# Altium PCB USB_Control.PcbDoc (part 1 of 2)
Units mil, origin at the board's own origin, x right, y up, seen from the top; angles counter-clockwise.
Board outline 3609 x 2250 mil, 4 copper layers (Component Side, Ground Plane, Power Plane, Solder Side), stack 26.634 mil thick; 208 components, 136 nets, 707 pads, 296 vias.
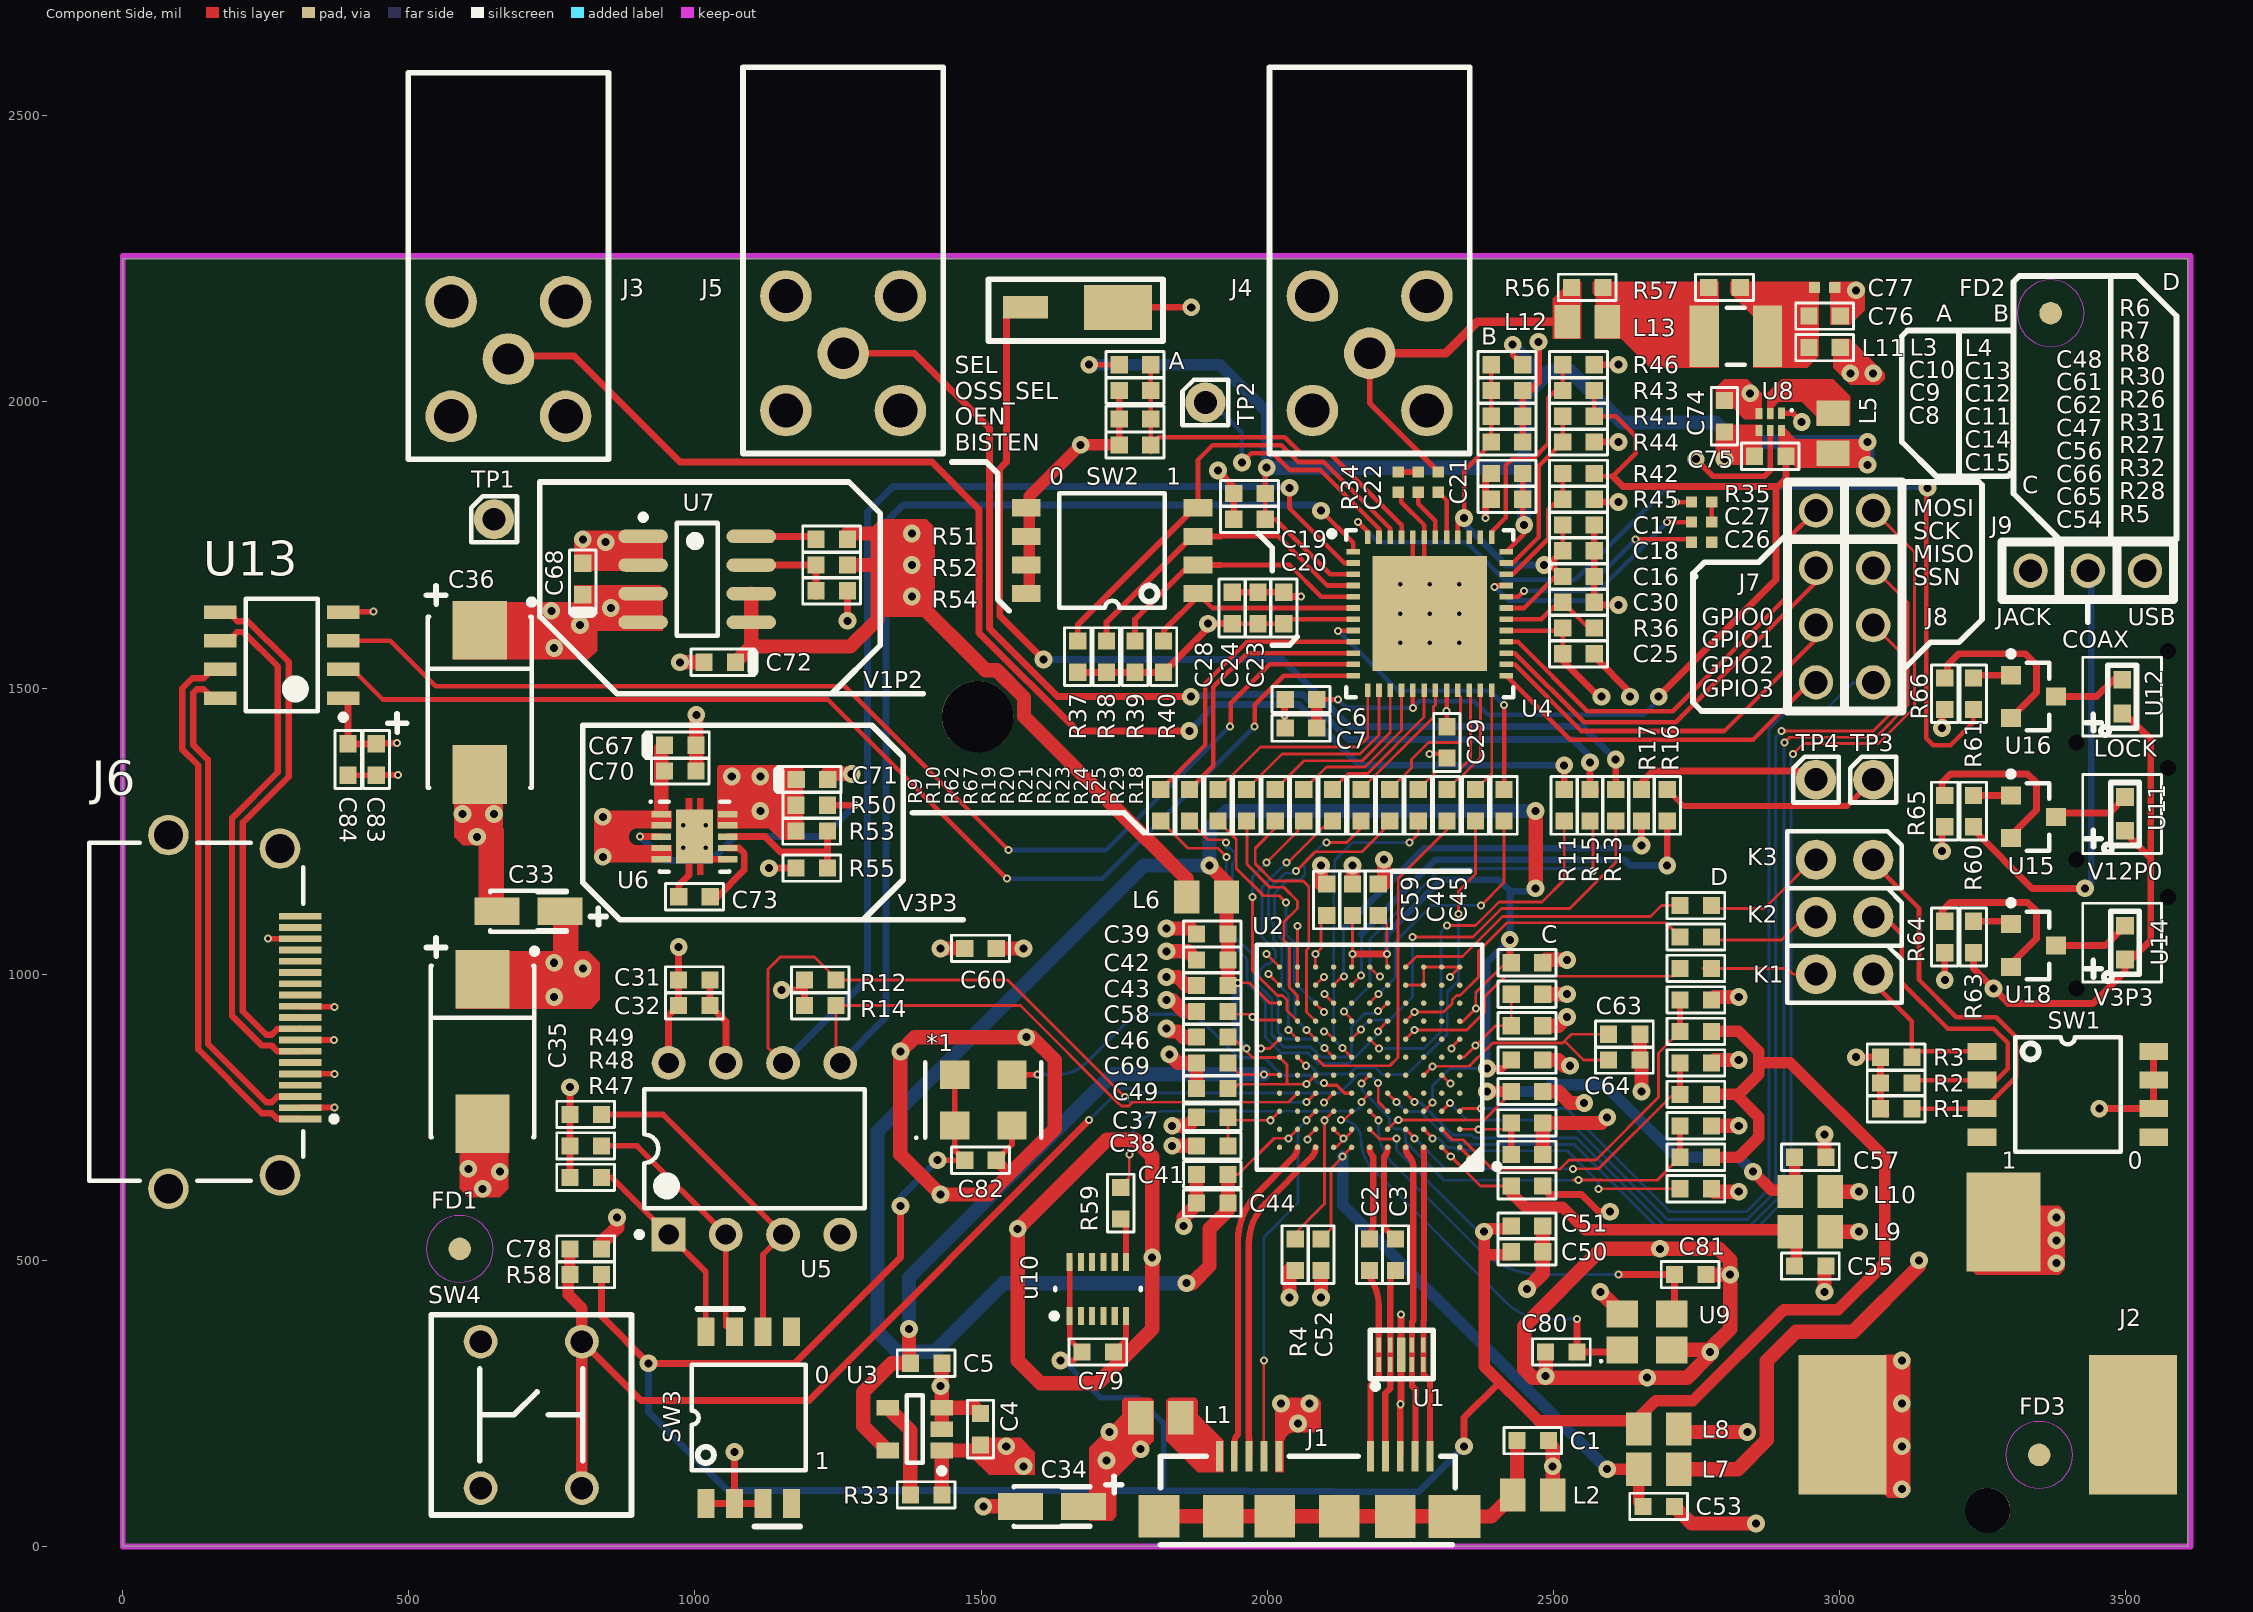
[diagram p0: Component Side view]
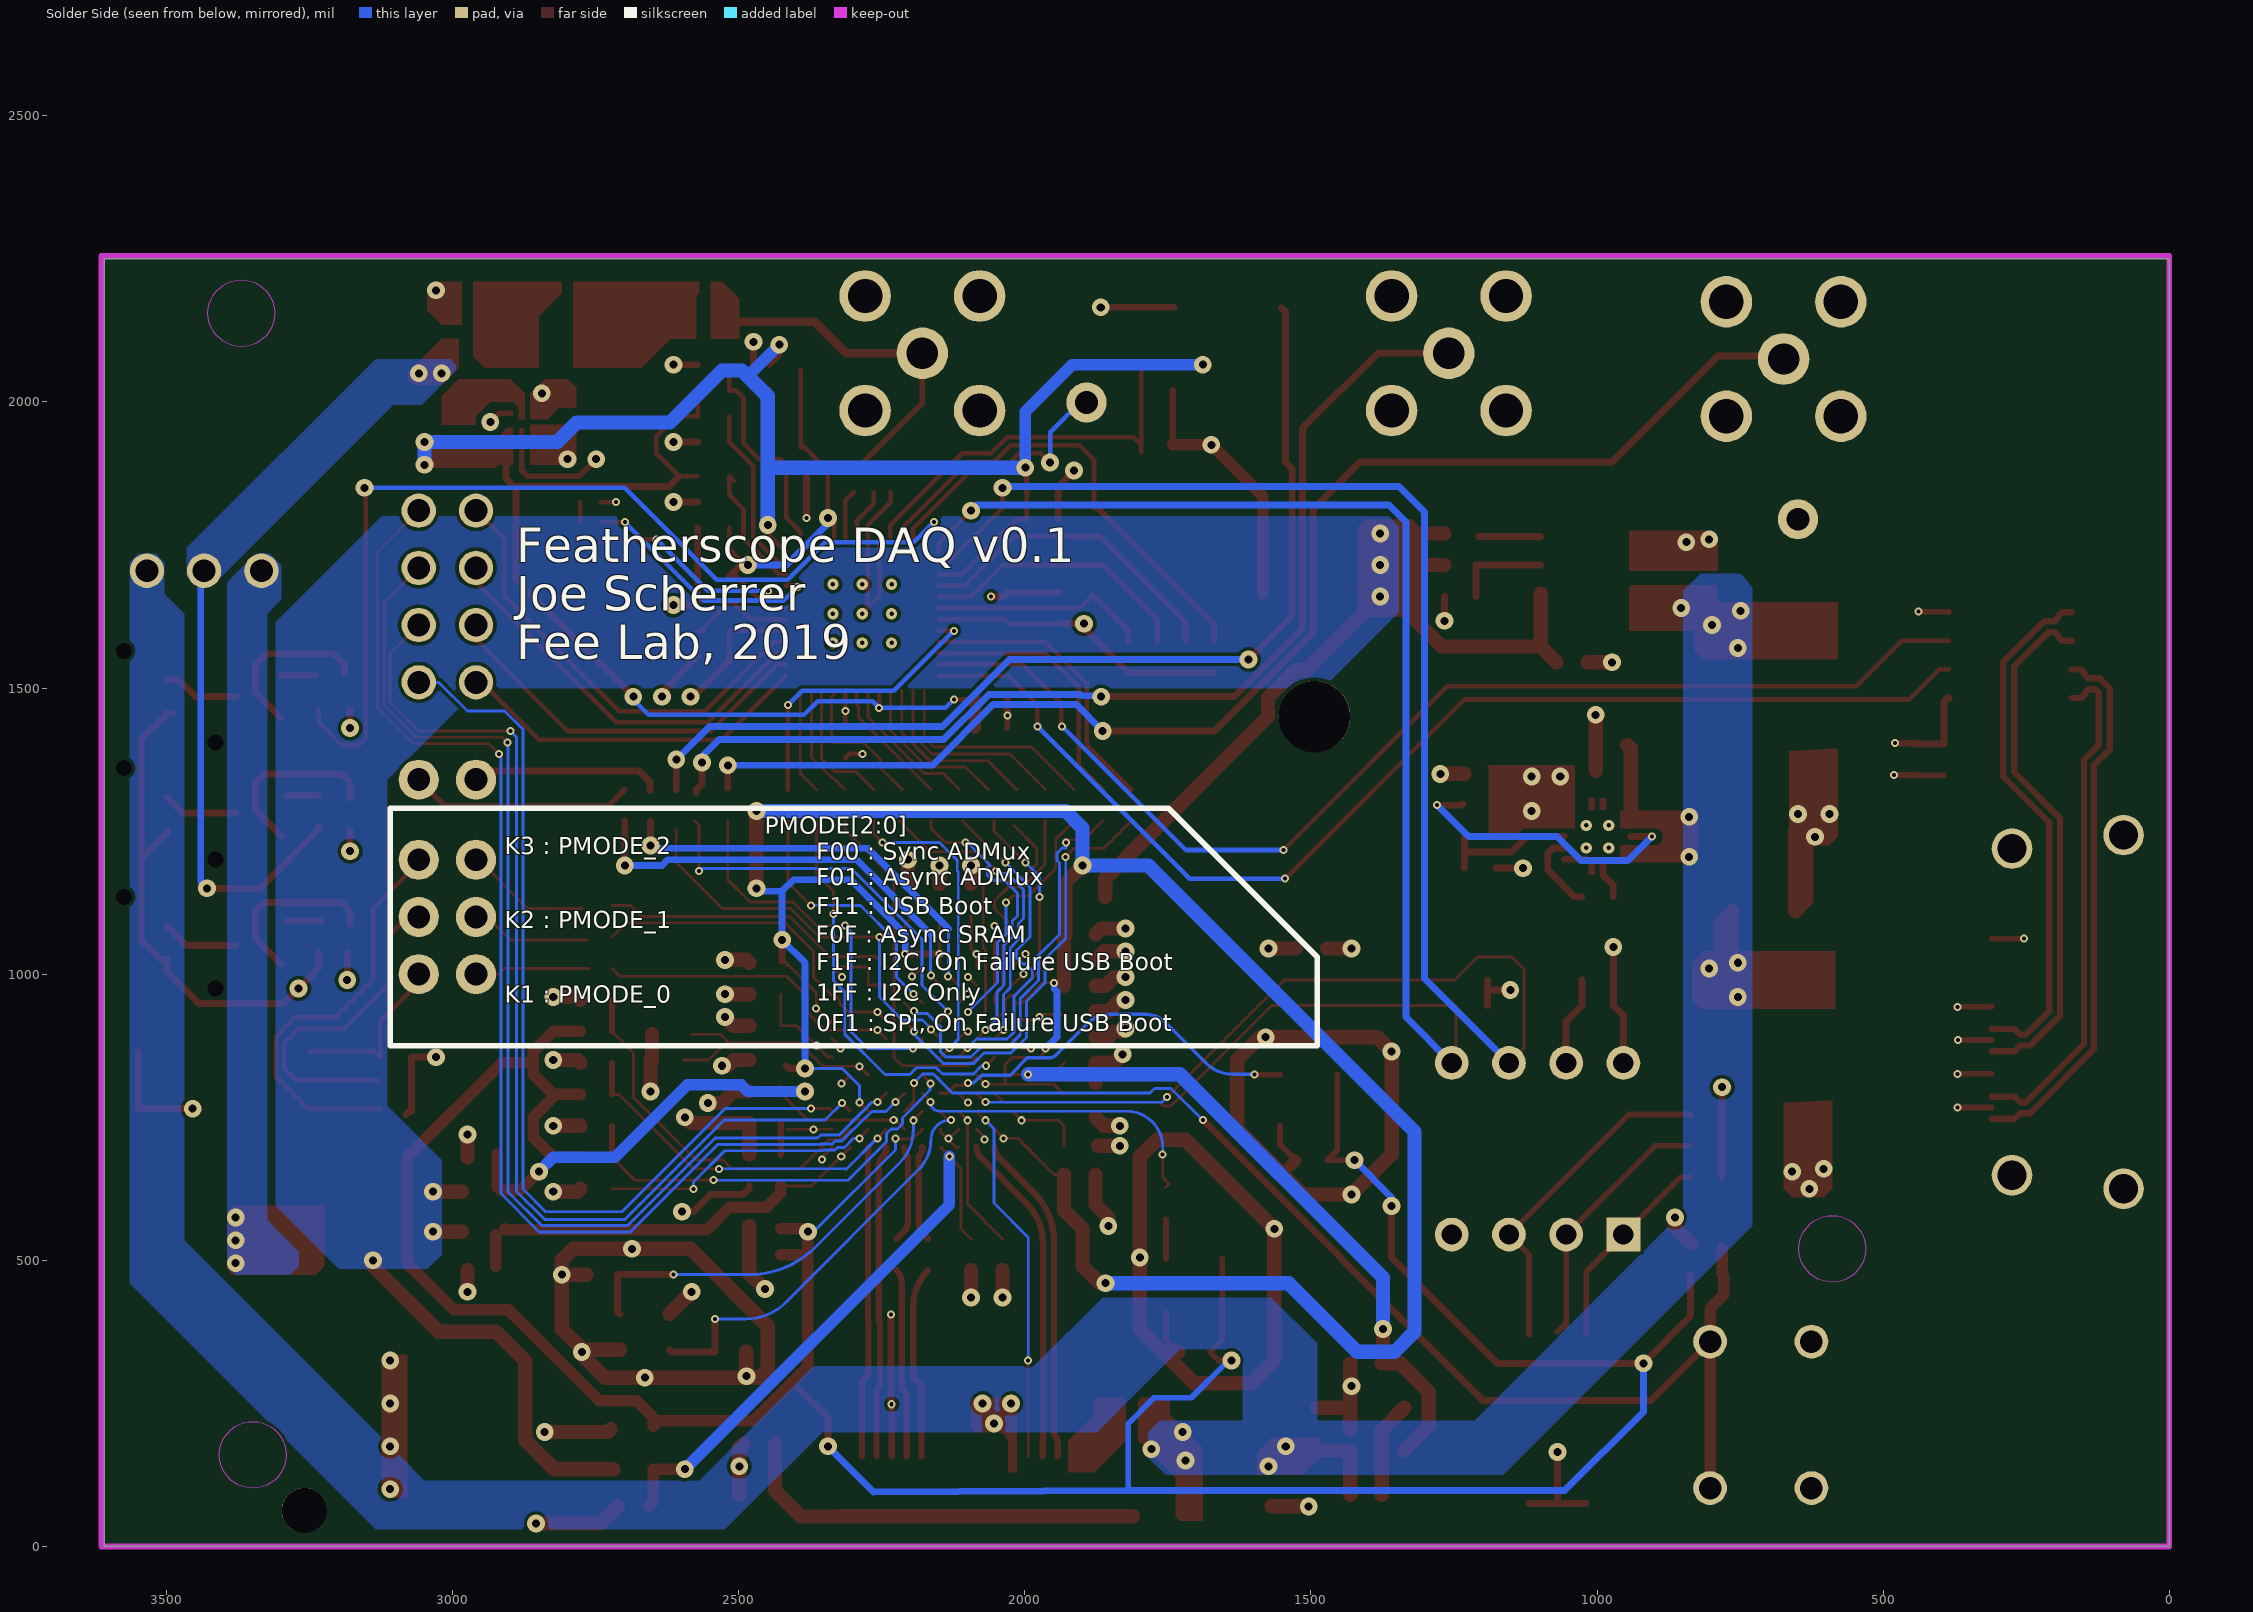
[diagram p1: Solder Side view, seen from below]
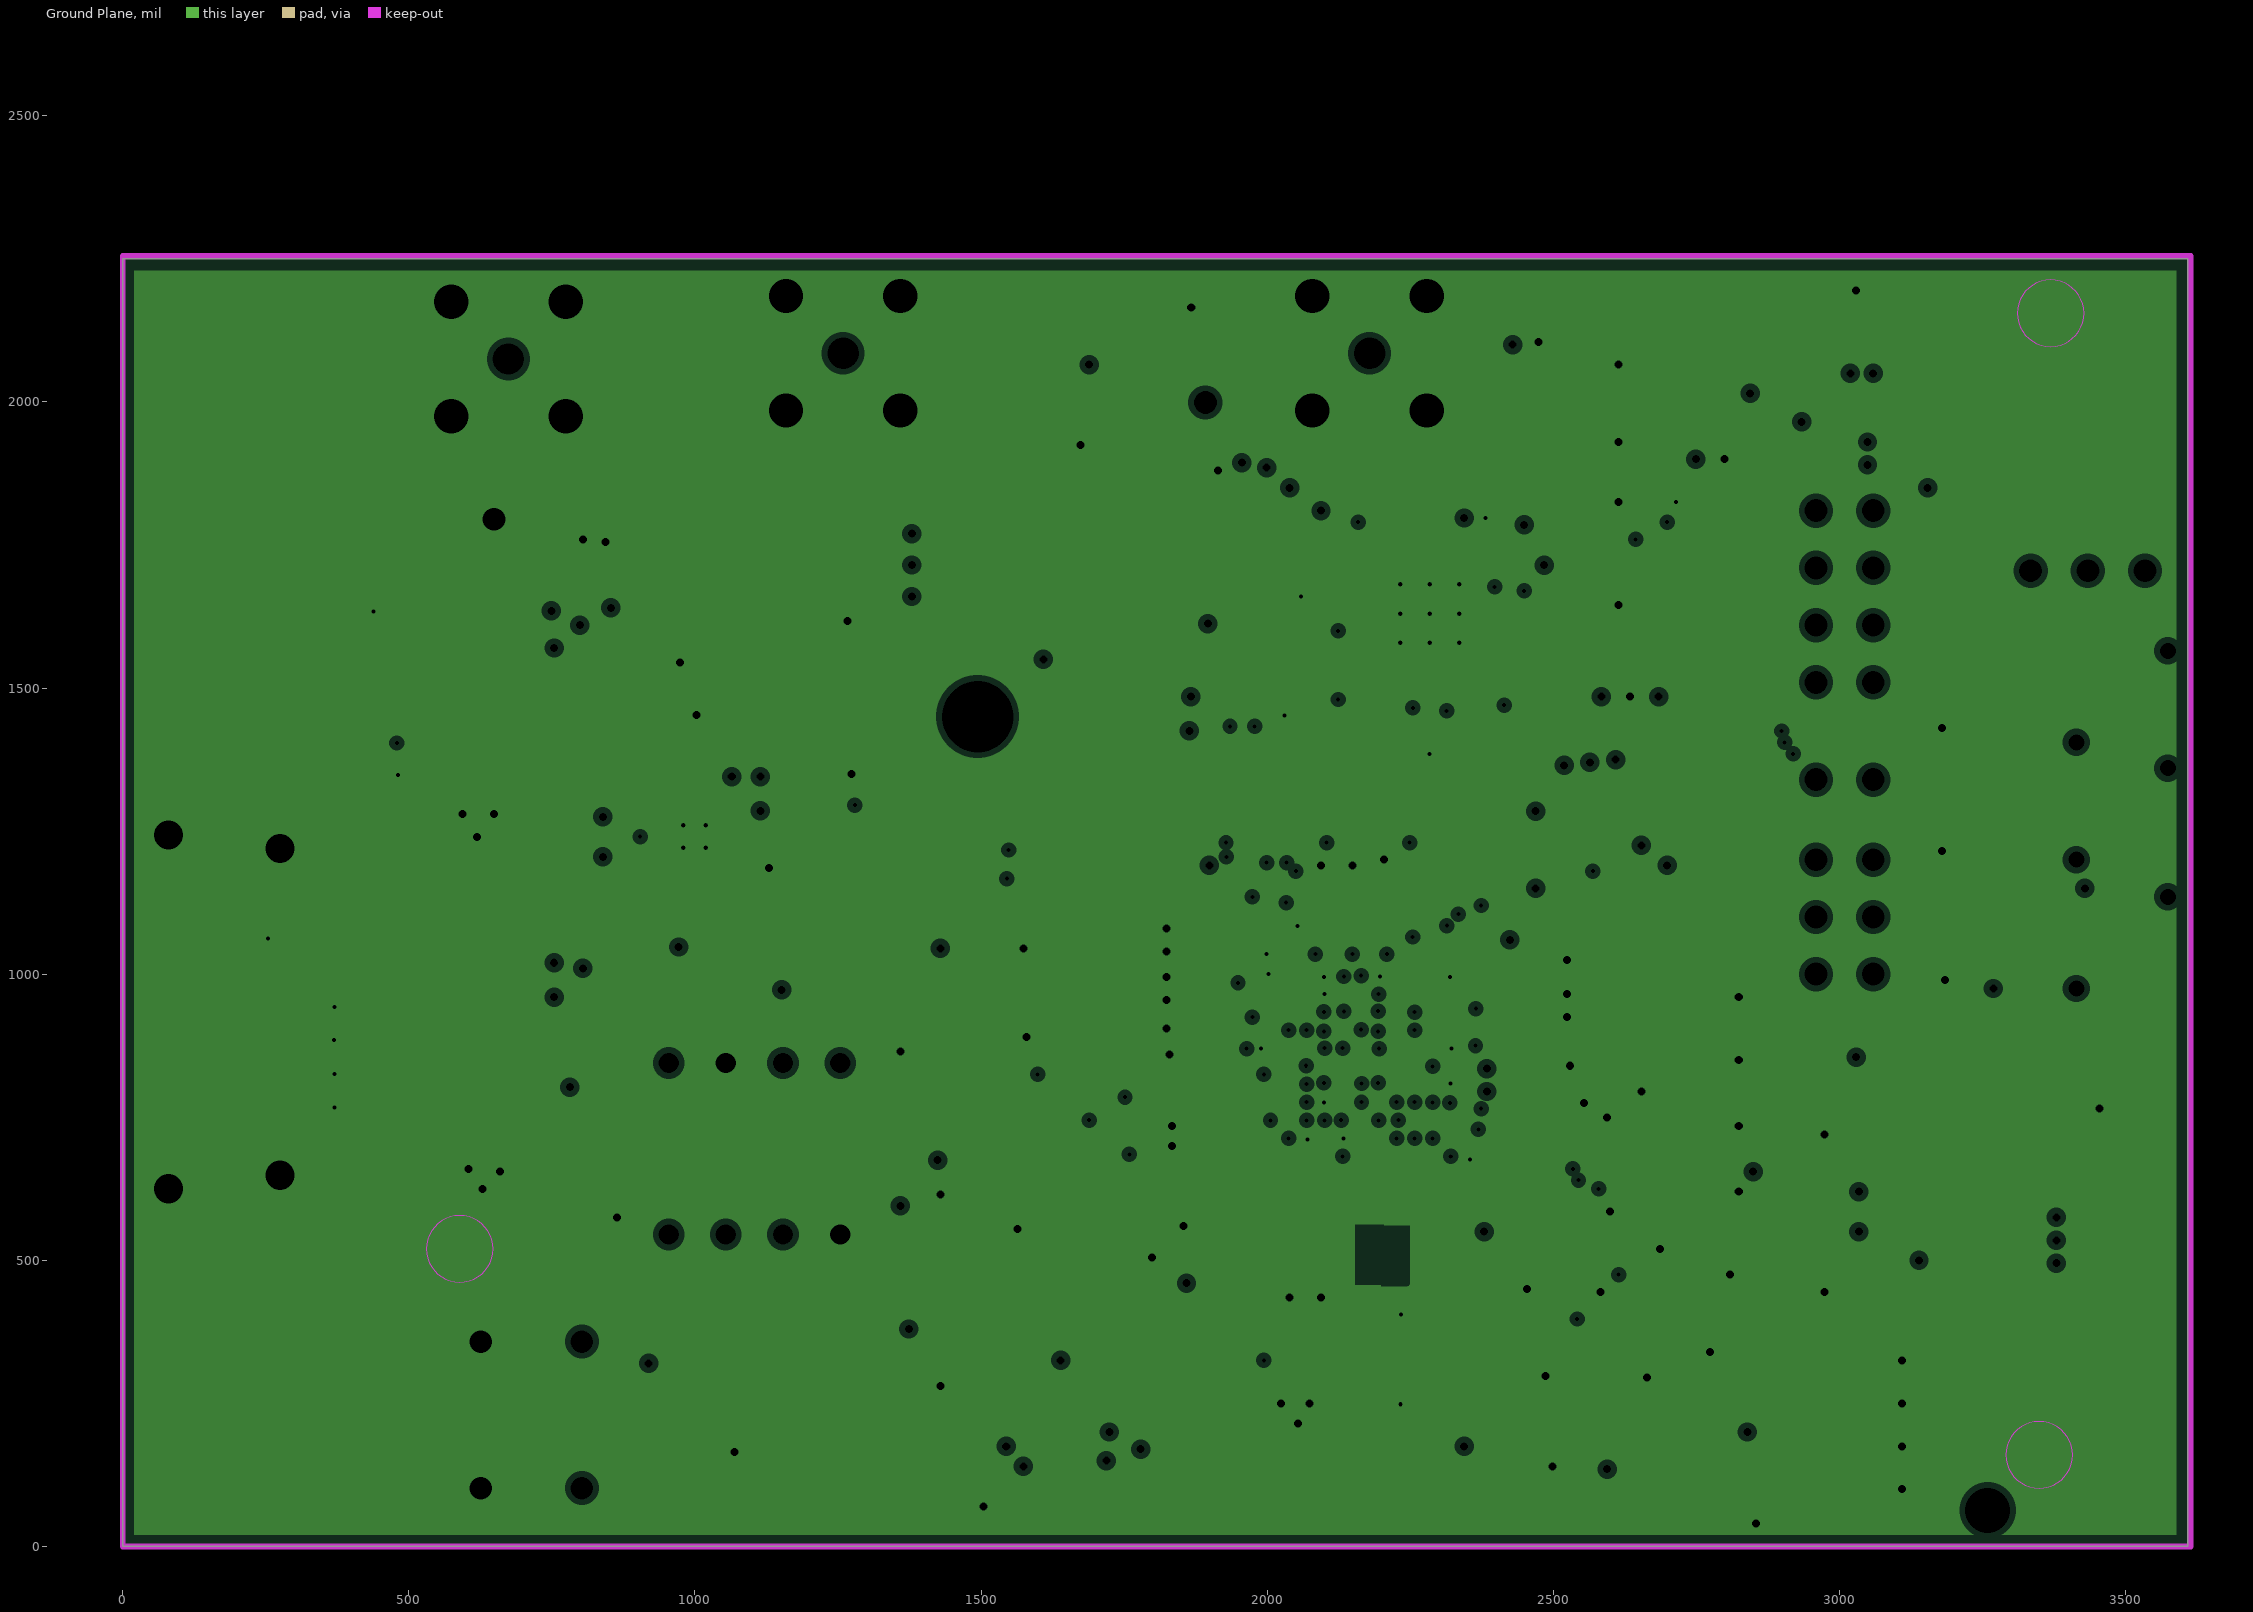
[diagram p2: Ground Plane, clearances drawn from the general rule]
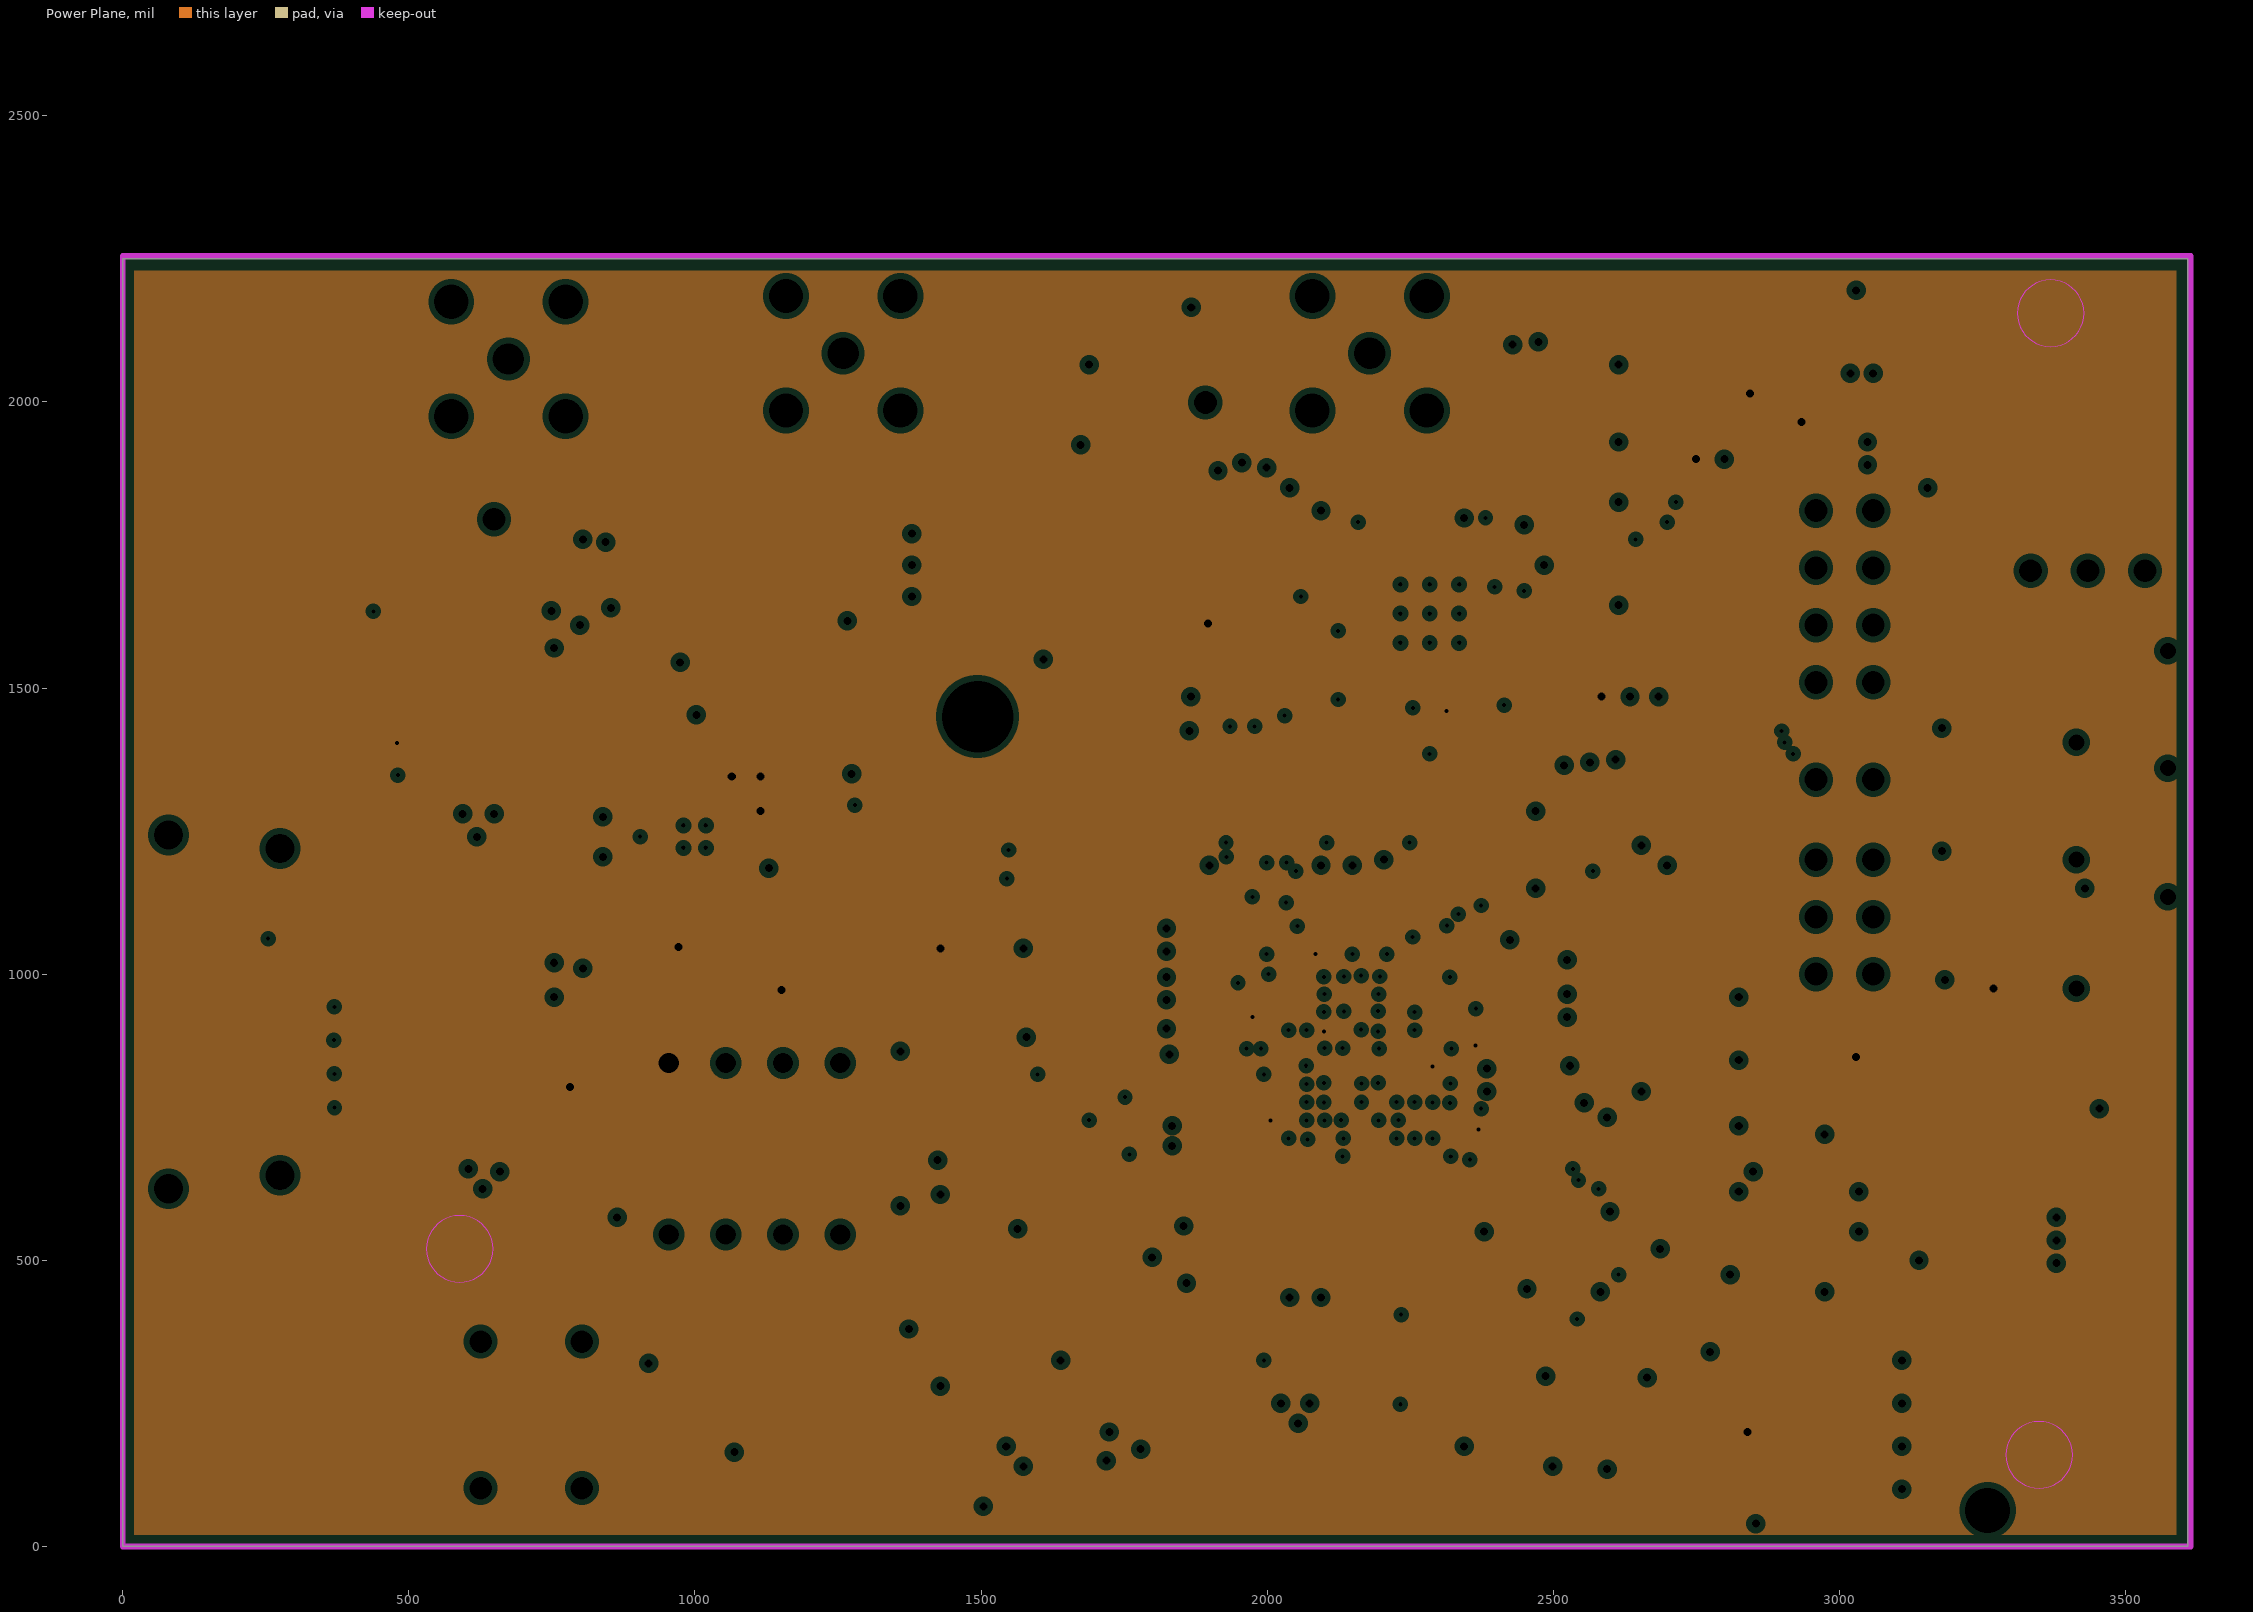
[diagram p3: Power Plane, clearances drawn from the general rule]

## Layer stack, top to bottom
Top Solder: solder mask 0.4, Solder Resist, Dk 3.5
Component Side: signal copper 1.4
Dielectric 1: core 8, FR-4, Dk 4.2
Ground Plane: plane copper 1.417, net GND
Dielectric 3: prepreg 5, Dk 4.2
Power Plane: plane copper 1.417, net VDDIO1
Dielectric 4: core 8, Dk 4.2
Solder Side: signal copper 1.4
Bottom Solder: solder mask 0.4, Solder Resist, Dk 3.5

## Board outline
0,0 3609,0 3609,2250 0,2250

## Design rules (kind name [scope] priority, off if disabled: settings)
Clearance [All] p1: gap=6 ignorepadtopadclearanceinfootprint=FALSE except(0: Arc-Hole Track-Hole SMDPad-Hole THPad-Hole Via-Hole Fill-Hole Poly-Hole Region-Hole Text-Hole)
DiffPairsRouting [All] p1: maxlimit=10 minlimit=8 mostfreqgap=8 toplayer_minwidth=11 toplayer_maxwidth=11 toplayer_prefwidth=11 bottomlayer_minwidth=11 bottomlayer_maxwidth=11 bottomlayer_prefwidth=11 substack1={BDF4E78D-FFDD-4CFD-9617-22F49E1C5A64} toplayer_{bdf4e78d-ffdd-4cfd-9617-22f49e1c5a64}_minwidth=15 toplayer_{bdf4e78d-ffdd-4cfd-9617-22f49e1c5a64}_maxwidth=15 toplayer_{bdf4e78d-ffdd-4cfd-9617-22f49e1c5a64}_prefwidth=15 bottomlayer_{bdf4e78d-ffdd-4cfd-9617-22f49e1c5a64}_minwidth=15 bottomlayer_{bdf4e78d-ffdd-4cfd-9617-22f49e1c5a64}_maxwidth=15 bottomlayer_{bdf4e78d-ffdd-4cfd-9617-22f49e1c5a64}_prefwidth=15 substack2={5CC0FF2F-6C5B-4AD1-996E-8DCDFC804B4A} toplayer_{5cc0ff2f-6c5b-4ad1-996e-8dcdfc804b4a}_minwidth=15 toplayer_{5cc0ff2f-6c5b-4ad1-996e-8dcdfc804b4a}_maxwidth=15 toplayer_{5cc0ff2f-6c5b-4ad1-996e-8dcdfc804b4a}_prefwidth=15 bottomlayer_{5cc0ff2f-6c5b-4ad1-996e-8dcdfc804b4a}_minwidth=15 bottomlayer_{5cc0ff2f-6c5b-4ad1-996e-8dcdfc804b4a}_maxwidth=15 bottomlayer_{5cc0ff2f-6c5b-4ad1-996e-8dcdfc804b4a}_prefwidth=15 substack3={54E1294D-CF2F-4B58-A66B-DF4558A29E13} toplayer_{54e1294d-cf2f-4b58-a66b-df4558a29e13}_minwidth=15 toplayer_{54e1294d-cf2f-4b58-a66b-df4558a29e13}_maxwidth=15 toplayer_{54e1294d-cf2f-4b58-a66b-df4558a29e13}_prefwidth=15 bottomlayer_{54e1294d-cf2f-4b58-a66b-df4558a29e13}_minwidth=15 bottomlayer_{54e1294d-cf2f-4b58-a66b-df4558a29e13}_maxwidth=15 bottomlayer_{54e1294d-cf2f-4b58-a66b-df4558a29e13}_prefwidth=15 substack4={BC01B312-1D72-4163-B4E9-233A3C7DBF2C} toplayer_{bc01b312-1d72-4163-b4e9-233a3c7dbf2c}_minwidth=15 toplayer_{bc01b312-1d72-4163-b4e9-233a3c7dbf2c}_maxwidth=15 toplayer_{bc01b312-1d72-4163-b4e9-233a3c7dbf2c}_prefwidth=15 bottomlayer_{bc01b312-1d72-4163-b4e9-233a3c7dbf2c}_minwidth=15 bottomlayer_{bc01b312-1d72-4163-b4e9-233a3c7dbf2c}_maxwidth=15 bottomlayer_{bc01b312-1d72-4163-b4e9-233a3c7dbf2c}_prefwidth=15 maxuncoupledlength=500
FanoutControl Fanout_BGA [IsBGA] p1: bgadir=Out bgaviamode=Centered fanoutstyle=BGA fanoutdirection=OutOnly viagrid=1 // Fanout_BGA (Default Rule)
MaxMinImpedance MaxMinImpedance_1 [InNet('D_N','D_P')] p1: minimum=90.00 maximum=110.0
MaxMinImpedance [InDifferentialPairClass('All Differential Pairs')] p2: minimum=84.00 maximum=96.00
MinimumSolderMaskSliver [All] p1: minsoldermaskwidth=5
PlaneClearance [All] p1: clearance=10
PlaneConnect [All] p1: planeconnectstyle=Direct reliefexpansion=20 reliefentries=4 reliefconductorwidth=10 reliefairgap=10
PolygonConnect [All] p1: connectstyle=Direct reliefconductorwidth=10 reliefentries=4 polygonreliefangle="90 Angle" airgapwidth=10
RoutingVias [All] p1: holewidth=7 width=14 viastyle="Through Hole" minholewidth=7 minwidth=14 maxholewidth=7 maxwidth=14
SilkToSilkClearance [All] p1: silktosilkclearance=5
SolderMaskExpansion [All] p1: expansion=1.5 istentingtop=FALSE
Width [All] p1: maxlimit=50 minlimit=5 preferedwidth=5 substack1={BDF4E78D-FFDD-4CFD-9617-22F49E1C5A64} substack2={5CC0FF2F-6C5B-4AD1-996E-8DCDFC804B4A} substack3={54E1294D-CF2F-4B58-A66B-DF4558A29E13} substack4={BC01B312-1D72-4163-B4E9-233A3C7DBF2C} minimp=50.000000 maximp=50.000000 favimp=50.000000
24 further rules are at their usual default settings.

## Classes and differential pairs
component class LEDs: FD1 FD2 FD3 LOCK LOCK1 R60 R61 R63 R64 R65 R66 U10 U11 U12 U14 U15 U16 U17 U18 V1 V2 V3P3 V12P0
net class DQ[0..9]: DQ0 DQ1 DQ2 DQ3 DQ4 DQ5 DQ6 DQ7 DQ8 DQ9
component class reset: C78 R58 SW4
component class power: C33 C34 C35 C36 C37 C38 C39 C40 C41 C42 C43 C44 C45 C46 C47 C48 C49 C50 C51 C52 C53 C54 C55 C56 C57 C58 C59 C60 C61 C62 C63 C64 C65 C66 C68 C69 C70 C71 C72 C73 C74 C75 J2 L5 L6 L7 L8 L9 L10 R50 R51 R52 R53 R54 R55 U6 U7 U8
component class EZ_USB: C1 C2 C3 C4 C5 J1 K1 K2 K3 L1 L2 R1 R2 R3 R4 R5 R6 R7 R8 R9 R10 R11 R12 R13 R14 R15 R16 R17 R18 R19 R20 R21 R22 R23 R24 R25 R26 R27 R28 R29 R30 R31 R32 R33 R62 R67 SW1 TP3 TP4 U1 U2 U3 U9
component class eeprom_memory: C31 C32 R47 R48 R49 SW3 U5
component class clocks: *1 C79 C80 C81 C82 R59 u6 u9 u10
component class connectors: C76 C77 C83 C84 J3 J4 J5 J6 J8 J9 J?1 L11 L12 L13 R56 R57 U13
component class deserial: C6 C7 C8 C9 C10 C11 C12 C13 C14 C15 C16 C17 C18 C19 C20 C21 C22 C23 C24 C25 C26 C27 C28 C29 C30 J7 L3 L4 R34 R35 R36 R37 R38 R39 R40 R41 R42 R43 R44 R45 R46 SW2 TP1 TP2 U4
differential pair NewDifferentialPair1: +NetJ6_7 -NetJ6_9
differential pair EZ_SSTX: +EZ_SSTX_P -EZ_SSTX_N
differential pair SS_TX: +SS_TX_P -SS_TX_N
differential pair SS_RX: +SS_RX_P -SS_RX_N
differential pair SS_D: +SS_D_P -SS_D_N

## Components (designator, comment, footprint, x,y, rotation, side; value= is the part's Value field where it differs from the comment)
*1 "FXO_HC53" FXO_HC53 1504,780 r90 top
C1 "Capacitor" "SMD Capacitor 0603" 2464,185 r180 top value=100nF
C2 "Capacitor" "SMD Capacitor 0603" 2179,510 r90 top value=100nF
C3 "Capacitor" "SMD Capacitor 0603" 2224,510 r90 top value=100nF
C4 "Capacitor" "SMD Capacitor 0603" 1499,205 r270 top value=1uF
C5 "Capacitor" "SMD Capacitor 0603" 1404,320 r180 top value=1uF
C6 "0.01uF" "SMD Capacitor 0603" 2059,1480 r180 top value=C?
C7 ".1uF" "SMD Capacitor 0603" 2059,1430 r180 top value=C?
C8 "0.01uF" "SMD Capacitor 0603" 1769,1925 r180 top value=C?
C9 ".1uF" "SMD Capacitor 0603" 1769,1970 r180 top value=C?
C10 "4.7uF" "SMD Capacitor 0603" 1769,2020 r180 top value=C?
C11 "0.01uF" "SMD Capacitor 0603" 2419,1930 r0 top value=C?
C12 ".1uF" "SMD Capacitor 0603" 2419,1975 r0 top value=C?
C13 "22uF" "SMD Capacitor 0603" 2419,2020 r0 top value=C?
C14 "0.01uF" "SMD Capacitor 0603" 2419,1875 r180 top value=C?
C15 ".1uF" "SMD Capacitor 0603" 2419,1830 r180 top value=C?
C16 "0.01uF" "SMD Capacitor 0603" 2544,1695 r0 top value=C?
C17 ".1uF" "SMD Capacitor 0603" 2544,1785 r0 top value=C?
C18 "22uF" "SMD Capacitor 0603" 2544,1740 r0 top value=C?
C19 "0.01uF" "SMD Capacitor 0603" 1969,1840 r180 top value=C?
C20 ".1uF" "SMD Capacitor 0603" 1969,1795 r180 top value=C?
C21 "0.1uF" "SMD CAP 0402" 2299,1860 r90 top value=C?
C22 "0.047uF" "SMD CAP 0402" 2264,1860 r90 top value=C?
C23 "4.7uF" "SMD Capacitor 0603" 2029,1640 r90 top value=C?
C24 ".1uF" "SMD Capacitor 0603" 1984,1640 r90 top value=C?
C25 "0.01uF" "SMD Capacitor 0603" 2544,1560 r0 top value=C?
C26 "0.1uF" "SMD CAP 0402" 2759,1755 r0 top value=C?
C27 "0.047uF" "SMD CAP 0402" 2759,1790 r0 top value=C?
C28 "0.01uF" "SMD Capacitor 0603" 1939,1640 r90 top value=C?
C29 "0.01uF" "SMD Capacitor 0603" 2314,1405 r270 top value=C?
C30 "10uF" "SMD Capacitor 0603" 2544,1650 r0 top value=C?
C31 "Capacitor" "SMD Capacitor 0603" 999,990 r0 top value=10nF
C32 "Capacitor" "SMD Capacitor 0603" 999,945 r0 top value=100nF
C33 "T491A" A 709,1110 r180 top value=100uF
C34 "T491A" A 1624,70 r180 top value=100uF
C35 "T495D" D 629,865 r270 top value=330uF
C36 "T495D" D 624,1475 r270 top value=330uF
C37 "Capacitor" "SMD Capacitor 0603" 1904,750 r0 top value=100nF
C38 "Capacitor" "SMD Capacitor 0603" 1904,700 r0 top value=10nF
C39 "Capacitor" "SMD Capacitor 0603" 1904,1070 r0 top value=22uF
C40 "Capacitor" "SMD Capacitor 0603" 2149,1130 r270 top value=100nF
C41 "Capacitor" "SMD Capacitor 0603" 1904,650 r0 top value=100nF
C42 "Capacitor" "SMD Capacitor 0603" 1904,1025 r0 top value=100nF
C43 "Capacitor" "SMD Capacitor 0603" 1904,980 r0 top value=10nF
C44 "Capacitor" "SMD Capacitor 0603" 1904,600 r0 top value=10nF
C45 "Capacitor" "SMD Capacitor 0603" 2194,1130 r270 top value=100nF
C46 "Capacitor" "SMD Capacitor 0603" 1904,890 r0 top value=100nF
C47 "Capacitor" "SMD Capacitor 0603" 2454,850 r180 top value=10nF
C48 "Capacitor" "SMD Capacitor 0603" 2454,1020 r180 top value=100nF
C49 "Capacitor" "SMD Capacitor 0603" 1904,800 r0 top value=10nF
C50 "Capacitor" "SMD Capacitor 0603" 2454,515 r180 top value=100nF
C51 "Capacitor" "SMD Capacitor 0603" 2454,560 r180 top value=10nF
C52 "Capacitor" "SMD Capacitor 0603" 2094,510 r90 top value=100nF
C53 "Capacitor" "SMD Capacitor 0603" 2684,70 r180 top value=2.2uF
C54 "Capacitor" "SMD Capacitor 0603" 2454,630 r180 top value=100nF
C55 "Capacitor" "SMD Capacitor 0603" 2949,490 r180 top value=22uF
C56 "Capacitor" "SMD Capacitor 0603" 2454,795 r180 top value=100nF
C57 "Capacitor" "SMD Capacitor 0603" 2949,680 r180 top value=22uF
C58 "Capacitor" "SMD Capacitor 0603" 1904,935 r0 top value=100nF
C59 "Capacitor" "SMD Capacitor 0603" 2104,1130 r270 top value=100nF
C60 "Capacitor" "SMD Capacitor 0603" 1499,1045 r180 top value=10nF
C61 "Capacitor" "SMD Capacitor 0603" 2454,965 r180 top value=100nF
C62 "Capacitor" "SMD Capacitor 0603" 2454,910 r180 top value=10nF
C63 "Capacitor" "SMD Capacitor 0603" 2624,895 r180 top value=100nF
C64 "Capacitor" "SMD Capacitor 0603" 2624,850 r180 top value=10nF
C65 "Capacitor" "SMD Capacitor 0603" 2454,685 r180 top value=100nF
C66 "Capacitor" "SMD Capacitor 0603" 2454,740 r180 top value=10nF
C67 "Capacitor Polarized" "Capacitor Polarized 0603" 924,1400 r0 top value=4.7uF
C68 "Capacitor Polarized" "Capacitor Polarized 0603" 804,1640 r90 top value=4.7uF
C69 "Capacitor" "SMD Capacitor 0603" 1904,845 r0 top value=100nF
C70 "Capacitor" "SMD Capacitor 0603" 974.31,1355.31 r180 top value=1uF
C71 "Capacitor Polarized" "Capacitor Polarized 0603" 1154,1340 r0 top value=10uF
C72 "Capacitor Polarized" "Capacitor Polarized 0603" 1094,1545 r180 top value=10uF
C73 "Capacitor" "SMD Capacitor 0603" 999.31,1135.31 r0 top value=OPEN
C74 "2.2uF" "SMD Capacitor 0603" 2799,1975 r270 top value=C?
C75 "4.7uF" "SMD Capacitor 0603" 2879,1905 r180 top value=C?
C76 "4.7uF" "SMD Capacitor 0603" 2974,2150 r0 top value=C?
C77 ".1uF" "SMD CAP 0402" 2974,2200 r0 top value=C?
C78 "Capacitor" "SMD Capacitor 0603" 809,520 r180 top value=100nF
C79 "Capacitor" "SMD Capacitor 0603" 1704,340 r180 top value=100nF
C80 "Capacitor" "SMD Capacitor 0603" 2514,340 r0 top value=12pF
C81 "Capacitor" "SMD Capacitor 0603" 2739,475 r180 top value=12pF
C82 "Capacitor" "SMD Capacitor 0603" 1499,675 r180 top value=10nF
C83 "Capacitor" "SMD Capacitor 0603" 443,1375.04 r90 top value=10uF
C84 "Capacitor" "SMD Capacitor 0603" 394,1375.04 r90 top value=100nF
FD1 "Fiducial Mark" "Fiducial Round" 589,520 r0 top
FD2 "Fiducial Mark" "Fiducial Round" 3369,2155 r0 top
FD3 "Fiducial Mark" "Fiducial Round" 3349,160 r0 top
J1 "USB3 MicroB" PCBComponent_1 2069,105 r0 top
J2 "DC-Power Jack" "PCBComponent_1 - duplicate" 3259,-55 r90 top
J3 "SMA" "SMA Right Angle Through Hole" 674,2075 r0 top
J4 "SMA" "SMA Right Angle Through Hole" 2179,2085 r0 top
J5 "SMA" "SMA Right Angle Through Hole" 1259,2085 r0 top
J6 "10029449-111RLF" FCI-10029449-111RLF_V 195.16,934.05 r270 top
J7 "4 Pin Connector" "4Pin Verital 0.1\"" 2959,1660 r270 top
J8 "4 Pin Connector" "4Pin Verital 0.1\"" 3059,1660 r270 top
J9 "3 Pin Connector" "3Pin Verital 0.1\" JUMOER" 3434,1705 r0 top
K1 "JMPR2" JMPR2 3059,1000 r270 top
K2 "JMPR2" JMPR2 3059,1100 r270 top
K3 "JMPR2" JMPR2 3059,1200 r270 top
L1 "Ferrite Bead" BLM21PG221SN1D_0805 1814,225 r180 top
L2 "Ferrite Bead" BLM21PG221SN1D_0805 2464,90 r180 top
L3 "Ferrite Bead" BLM18KG601SN1D 1769,2065 r0 top
L4 "Ferrite Bead" BLM18KG601SN1D 2419,2065 r180 top
L5 "Ferrite Bead" LQM21PN2R2MC0D 2989,1945 r270 top
L6 "Ferrite Bead" MPZ2012S601A 1894,1135 r0 top
L7 "Ferrite Bead" MPZ2012S601A 2684,135 r180 top
L8 "Ferrite Bead" MPZ2012S601A 2684,205 r0 top
L9 "Ferrite Bead" MPZ2012S601A 2949,550 r180 top
L10 "Ferrite Bead" MPZ2012S601A 2949,620 r180 top
L11 "Ferrite Bead" BLM18KG601SN1D 2974,2095 r0 top
L12 "Ferrite Bead" CIG21L4R7MNE 2559,2140 r0 top
L13 "Ferrite Bead" CBC3225T101MR 2819,2115 r0 top
LOCK "Light Pipe" "Light Pipe" 3494,1485 r0 top
R1 "10K" "SMD Resistor 0603" 3099,765 r0 top
R2 "Resistor" "SMD Resistor 0603" 3099,810 r0 top value=10K
R3 "Resistor" "SMD Resistor 0603" 3099,855 r0 top value=10K
R4 "Resistor" "SMD Resistor 0603" 2049,510 r90 top value=6.04K
R5 "Resistor" "SMD Resistor 0603" 2749,625 r180 top value=200
R6 "\"=Value\"" "SMD Resistor 0603" 2749,1120 r0 top value=22
R7 "Resistor" "SMD Resistor 0603" 2749,1065 r0 top value=22
R8 "Resistor" "SMD Resistor 0603" 2749,1010 r0 top value=22
R9 "Resistor" "SMD Resistor 0603" 1814,1295 r90 top value=22
R10 "Resistor" "SMD Resistor 0603" 1864,1295 r90 top value=22
R11 "Resistor" "SMD Resistor 0603" 2519,1295 r90 top value=22
R12 "Resistor" "SMD Resistor 0603" 1219,990 r180 top value=2k
R13 "Resistor" "SMD Resistor 0603" 2609,1295 r90 top value=22
R14 "Resistor" "SMD Resistor 0603" 1219,945 r180 top value=2k
R15 "Resistor" "SMD Resistor 0603" 2564,1295 r90 top value=22
R16 "Resistor" "SMD Resistor 0603" 2699,1295 r90 top value=22
R17 "Resistor" "SMD Resistor 0603" 2654,1295 r90 top value=22
R18 "Resistor" "SMD Resistor 0603" 2414,1295 r90 top value=22
R19 "Resistor" "SMD Resistor 0603" 2014,1295 r90 top value=22
R20 "Resistor" "SMD Resistor 0603" 2064,1295 r90 top value=22
R21 "Resistor" "SMD Resistor 0603" 2114,1295 r90 top value=22
R22 "Resistor" "SMD Resistor 0603" 2164,1295 r90 top value=22
R23 "Resistor" "SMD Resistor 0603" 2214,1295 r90 top value=22
R24 "Resistor" "SMD Resistor 0603" 2264,1295 r90 top value=22
R25 "Resistor" "SMD Resistor 0603" 2314,1295 r90 top value=22
R26 "Resistor" "SMD Resistor 0603" 2749,900 r0 top value="10K DNL"
R27 "Resistor" "SMD Resistor 0603" 2749,790 r0 top value="10K DNL"
R28 "Resistor" "SMD Resistor 0603" 2749,680 r0 top value="10K DNL"
R29 "Resistor" "SMD Resistor 0603" 2364,1295 r90 top value=22
R30 "Resistor" "SMD Resistor 0603" 2749,955 r180 top value=10K
R31 "Resistor" "SMD Resistor 0603" 2749,845 r180 top value=10K
R32 "Resistor" "SMD Resistor 0603" 2749,735 r180 top value=10K
R33 "Resistor" "SMD Resistor 0603" 1404,90 r0 top value=1M
R34 "49.9" "SMD RES 0402" 2229,1860 r270 top value=?
R35 "49.9" "SMD RES 0402" 2759,1825 r180 top value=?
R36 "10k" "SMD Resistor 0603" 2544,1605 r0 top value=?
R37 "10k" "SMD Resistor 0603" 1669,1555 r270 top value=?
R38 "10k" "SMD Resistor 0603" 1719,1555 r270 top value=?
R39 "10k" "SMD Resistor 0603" 1769,1555 r270 top value=?
R40 "10k" "SMD Resistor 0603" 1819,1555 r270 top value=?
R41 "10k" "SMD Resistor 0603" 2544,1975 r0 top value=?
R42 "10k" "SMD Resistor 0603" 2544,1875 r0 top value=?
R43 "10k" "SMD Resistor 0603" 2544,2020 r0 top value=?
R44 "?" "SMD Resistor 0603" 2544,1930 r180 top
R45 "?" "SMD Resistor 0603" 2544,1830 r180 top
R46 "?" "SMD Resistor 0603" 2544,2065 r180 top
R47 "Resistor" "SMD Resistor 0603" 809,645 r180 top value=10K
R48 "Resistor" "SMD Resistor 0603" 809,700 r180 top value=10K
R49 "Resistor" "SMD Resistor 0603" 809,755 r180 top value=10K
R50 "Resistor" "SMD Resistor 0603" 1204.31,1295.31 r180 top value=1K
R51 "Resistor" "SMD Resistor 0603" 1239,1760 r0 top value=10K
R52 "Resistor" "SMD Resistor 0603" 1239,1715 r0 top value=430
R53 "Resistor" "SMD Resistor 0603" 1204,1250 r180 top value=3.57K
R54 "Resistor" "SMD Resistor 0603" 1239,1670 r180 top value=30.1K
R55 "Resistor" "SMD Resistor 0603" 1204.31,1185.31 r0 top value=1.15K
R56 "1k" "SMD Resistor 0603" 2559,2200 r0 top value=?
R57 "1k" "SMD Resistor 0603" 2799,2200 r0 top value=?
R58 "Resistor" "SMD Resistor 0603" 809,475 r0 top value=100K
R59 "Resistor" "SMD Resistor 0603" 1744,600 r90 top value=33
R60 "Resistor" "SMD Resistor 0603" 3234,1285 r270 top value=1k
R61 "Resistor" "SMD Resistor 0603" 3234,1490 r270 top value=1k
R62 "Resistor" "SMD Resistor 0603" 1914,1295.31 r90 top value=22
R63 "Resistor" "SMD Resistor 0603" 3234,1065 r270 top value=1k
R64 "Resistor" "SMD Resistor 0603" 3184,1065 r90 top value=180
R65 "Resistor" "SMD Resistor 0603" 3184,1285 r90 top value=180
R66 "Resistor" "SMD Resistor 0603" 3184,1490 r90 top value=180
R67 "Resistor" "SMD Resistor 0603" 1964,1295 r90 top value=22
SW1 "SW_DIP_4Position" 218-4LPST 3249,865 r0 top
SW2 "SW_DIP_4Position" 218-4LPST 1879,1665 r180 top
SW3 "SW_DIP_4Position" 218-4LPST 1019,75 r90 top
SW4 "PB_Switch" EVQPAC07K 714,230 r0 top
TP1 "TESTPIN" TESTPIN 649,1795 r0 top
TP2 "TESTPIN" TESTPIN 1892,1999 r0 top
TP3 "TESTPIN" TESTPIN 3059,1340 r0 top
TP4 "TESTPIN" TESTPIN 2959,1340 r0 top
U1 "ESD_4Channel" SP3010-04UTG 2234,335 r180 top
U2 "EZ FX3 USB" BGA121C80P11X11_1000X1000X100 2179,855 r180 top
U3 "USB Overvoltage Protection" "TSOP-5 _ NCP361SNT1G" 1384,205 r180 top
U4 "DS90UR914A" "WQFN48 for DS90UB914A" 2284,1630 r0 top
U5 "24AA1025-I/P" PDIP300-P8 1104,695 r90 top
U6 "TPS74801DRCR" TI-DRC10-2400X1650TP_V 999.31,1240.31 r0 top
U7 "TPS76801QD" TI-D8_N 1004,1690 r0 top
U8 "TPS62231DRYT" DRY6 2879,1964.84 r270 top
U9 "CrystalOSC_General" NX3225SA 2664,375 r90 top (schematic designator u9)
u10 "SG-3040LC" SG-3040LC 1704,450 r90 top
U11 "LED" LED_0603 3499,1280 r90 top
U12 "LED" LED_0603 3494,1485 r90 top
U13 "ADN4663" SOIC127P600X175-8N 278,1557.5 r180 top
U14 "LED" LED_0603 3499,1055 r90 top
U15 "transistor NPN" SOT23127P600-8N 3339,1275 r0 top
U16 "transistor NPN" SOT23127P600-8N 3339,1485 r0 top
U18 "transistor NPN" SOT23127P600-8N 3339,1050 r0 top
V3P3 "Light Pipe" "Light Pipe" 3494,1055 r0 top
V12P0 "Light Pipe" "Light Pipe" 3494,1280 r0 top

## Footprints (in the part's own frame and the unit in brackets; to place one, negate y for a bottom-side part, rotate by r counter-clockwise, add the part's x,y. Pads: shape width x height; smd on the part's side, far side on the other; paste and mask are expansions set on the pad)
"3Pin Verital 0.1\" JUMOER" [mil] "3Pin Verital 0.1\""
  round 60 hole 40: 1(-100,0) 2(0,0) 3(100,0)
  silkscreen extent -150,-50 150,50, body extent -140,-50 142,50, height 335
"4Pin Verital 0.1\"" [mil] "4Pin Verital 0.1\""
  round 60 hole 40: 1(-150,0) 2(-50,0) 3(50,0) 4(150,0)
  silkscreen extent -200,-50 200,50, body extent -190,-50 190,50, height 335
218-4LPST [mm] "4 position switch"
  rect 1.27x0.76 smd: 1(0,0) 2(0,-1.27) 3(0,-2.54) 4(0,-3.81) 5(7.62,-3.81) 6(7.62,-2.54) 7(7.62,-1.27) 8(7.62,0)
  silkscreen extent 1.47,-4.44 6.15,0.64
A [mm] "Capacitor, SM Tantalum; Body 3.2 x 1.6 mm (LxW typ)"
  rect 2x1.2 smd: 1(-1.4,0) 2(1.4,0)
  silkscreen extent -1.7,-0.9 1.7,0.9
BGA121C80P11X11_1000X1000X100 [mm] "BGA, 121-Leads, Body 10.00x10.00mmx1.00mm, Pitch 0.80mm"
  round 0.24 smd: A1(-4,4) A2(-3.2,4) A3(-2.4,4) A4(-1.6,4) A5(-0.8,4) A6(0,4) A7(0.8,4) A8(1.6,4) A9(2.4,4) A10(3.2,4) A11(4,4) B1(-4,3.2) B2(-3.2,3.2) B3(-2.4,3.2) B4(-1.6,3.2) B5(-0.8,3.2) B6(0,3.2) B7(0.8,3.2) B8(1.6,3.2) B9(2.4,3.2) B10(3.2,3.2) B11(4,3.2) C1(-4,2.4) C2(-3.2,2.4) C3(-2.4,2.4) C4(-1.6,2.4) C5(-0.8,2.4) C6(0,2.4) C7(0.8,2.4) C8(1.6,2.4) C9(2.4,2.4) C10(3.2,2.4) C11(4,2.4) D1(-4,1.6) D2(-3.2,1.6) D3(-2.4,1.6) D4(-1.6,1.6) D5(-0.8,1.6) D6(0,1.6) D7(0.8,1.6) D8(1.6,1.6) D9(2.4,1.6) D10(3.2,1.6) D11(4,1.6) E1(-4,0.8) E2(-3.2,0.8) E3(-2.4,0.8) E4(-1.6,0.8) E5(-0.8,0.8) E6(0,0.8) E7(0.8,0.8) E8(1.6,0.8) E9(2.4,0.8) E10(3.2,0.8) E11(4,0.8) F1(-4,0) F2(-3.2,0) F3(-2.4,0) F4(-1.6,0) F5(-0.8,0) F6(0,0) F7(0.8,0) F8(1.6,0) F9(2.4,0) F10(3.2,0) F11(4,0) G1(-4,-0.8) G2(-3.2,-0.8) G3(-2.4,-0.8) G4(-1.6,-0.8) G5(-0.8,-0.8) G6(0,-0.8) G7(0.8,-0.8) G8(1.6,-0.8) G9(2.4,-0.8) G10(3.2,-0.8) G11(4,-0.8) H1(-4,-1.6) H2(-3.2,-1.6) H3(-2.4,-1.6) H4(-1.6,-1.6) H5(-0.8,-1.6) H6(0,-1.6) H7(0.8,-1.6) H8(1.6,-1.6) H9(2.4,-1.6) H10(3.2,-1.6) H11(4,-1.6) J1(-4,-2.4) J2(-3.2,-2.4) J3(-2.4,-2.4) J4(-1.6,-2.4) J5(-0.8,-2.4) J6(0,-2.4) J7(0.8,-2.4) J8(1.6,-2.4) J9(2.4,-2.4) J10(3.2,-2.4) J11(4,-2.4) K1(-4,-3.2) K2(-3.2,-3.2) K3(-2.4,-3.2) K4(-1.6,-3.2) K5(-0.8,-3.2) K6(0,-3.2) K7(0.8,-3.2) K8(1.6,-3.2) K9(2.4,-3.2) K10(3.2,-3.2) K11(4,-3.2) L1(-4,-4) L2(-3.2,-4) L3(-2.4,-4) L4(-1.6,-4) L5(-0.8,-4) L6(0,-4) L7(0.8,-4) L8(1.6,-4) L9(2.4,-4) L10(3.2,-4) L11(4,-4)
  silkscreen extent -5.77,-5 5,5, body extent -5,-5 5,5, height 1
BLM18KG601SN1D [mil] "0603 Ferrite Chip 600OHM 1.3A"
  rect 30x30 smd: 1(-27.5,0) 2(27.5,0)
  silkscreen extent -50,-23 50,23, body extent -32,-15 32,15, height 19
BLM21PG221SN1D_0805 [mm] "Chip Inductor, 2-Leads, 0805, BLM21PG221SN1D"
  rect 1.13x1.47 smd: 1(-0.885,0) 2(0.885,0)
  body extent -1.1,-0.72 1.1,0.72, height 1.05
"Capacitor Polarized 0603" [mil]
  rect 30x30 smd: +(23,0) -(78,0)
  silkscreen extent -10,-23 101,23, body extent 19,-15 82,15, height 19
CBC3225T101MR [mm] "Chip Inductor, 2-Leads, Body 3.20x2.50mm, IPC Medium Density, 100uH, 340mA, 1.82OHM"
  rect 1.29x2.72 smd: 1(-1.405,0) 2(1.405,0)
  silkscreen extent -0.4,-1.26 0.4,1.26, body extent -1.7,-1.35 1.7,1.35, height 2.7
CIG21L4R7MNE [mm] "SMD 0805 4.7uH, 750mA"
  rect 1.13x1.47 smd: 1(-0.885,0) 2(0.885,0)
  body extent -1.1,-0.72 1.1,0.72, height 1.05
D [mm] "Capacitor, SM Tantalum; Body 7.3 x 4.3 mm (LxW typ)"
  rect 2.6x2.4 smd: 1(-3.2,0) 2(3.2,0)
  silkscreen extent -4.57,-2.3 3.8,2.43
DRY6 [mm] "PSON, 6-Leads, Body 1x1.45mm, Pitch 0.5mm, TI Recommended"
  rect 0.52x0.3 smd paste+0 mask+0.05: 1(-0.385,0.5)
  rect 0.49x0.3 smd paste+0 mask+0.05: 2(-0.385,0) 3(-0.385,-0.5) 4(0.385,-0.5) 5(0.385,0) 6(0.385,0.5)
  silkscreen extent -0.57,0.9 -0.48,1, body extent -0.53,-0.75 0.53,0.75, height 0.6
EVQPAC07K [mm] "Push Button Switch"
  round 1.5 hole 1: 1(-2.25,-3.25) 1(-2.25,3.25) 2(2.25,-3.25) 2(2.25,3.25)
  silkscreen extent -4.44,-4.44 4.44,4.44
FCI-10029449-111RLF_V [mm] "SMD, 19-Leads, Body 15x9.5mm, Pitch 0.5mm"
  rect 0.3x1.9 smd: 1(4.75,2.925) 2(4.25,2.925) 3(3.75,2.925) 4(3.25,2.925) 5(2.75,2.925) 6(2.25,2.925) 7(1.75,2.925) 8(1.25,2.925) 9(0.75,2.925) 10(0.25,2.925) 11(-0.25,2.925) 12(-0.75,2.925) 13(-1.25,2.925) 14(-1.75,2.925) 15(-2.25,2.925) 16(-2.75,2.925) 17(-3.25,2.925) 18(-3.75,2.925) 19(-4.25,2.925)
  round 1.8 hole 1.3: 20(-7.25,2.025) 21(-7.85,-2.925) 22(7.85,-2.925) 23(7.25,2.025)
  silkscreen extent -7.5,-6.44 7.5,4.55, body extent -8.1,-6.44 8.1,3.45, height 6.11
"Fiducial Round" [mm] "Fiducial Round 1mm"
  round 1 smd paste-1 mask+1: NC(0,0)
  Keep-Out Layer circle w0: c0,0 r1.481
FXO_HC53 [mm] "Oscillator_CMOS_3.3V"
  rect 1.25x1.3 smd: 1(-1.125,1.27) 2(-1.125,-1.27) 3(1.125,-1.27) 4(1.125,1.27)
  silkscreen extent -1.72,-2.58 1.68,3.02, body extent -1.68,-2.58 1.68,2.57, height 1.4
JMPR2 [mil]
  round 70 hole 40: 1(0,0) 2(0,-100)
  silkscreen extent -50,-150 50,50, body extent -50,-150 50,50, height 300
LED_0603 [mil] "LTST-C190KGKT"
  rect 31x31 smd: A(-29.5,0) C(29.5,0)
  silkscreen extent -67,-25 55,37
"Light Pipe" [mil] "Light Pipe"
  round 0 hole 28 unplated: NC(-80,-80) NC(80,80)
  silkscreen extent -69,-69 69,69
LQM21PN2R2MC0D [mm] "SMD Fixed Ind. 2.2uH, 600mA, 0805"
  rect 1.13x1.47 smd: 1(-0.885,0) 2(0.885,0)
  body extent -1.1,-0.72 1.1,0.72, height 1.05
MPZ2012S601A [mm] "Ferrite Chip 600Ohm"
  rect 1.13x1.47 smd: 1(-0.885,0) 2(0.885,0)
  body extent -1.1,-0.72 1.1,0.72, height 1.05
NX3225SA [mm] "Crystal"
  rect 1.2x1.4 smd: 1(-0.8,1.1) 2(0.8,-1.1) NC(-0.8,-1.1) NC(0.8,1.1)
  silkscreen extent -1.35,2 -1.25,2.1, body extent -1.3,-1.65 1.3,1.65, height 0.6
PCBComponent_1 [mil] "897-10-010-40-300002 SERIES 897 • UNIVERSAL SERIAL BUS 3.0 MICRO-B"
  rect 12x53 smd: 1(-152.5,52.75) 2(-126.5,52.75) 3(-100.5,52.75) 4(-74.5,52.75) 5(-48.5,52.75) 6(111.5,52.75) 7(137.5,52.75) 8(163.5,52.75) 9(189.5,52.75) 10(215.5,52.75)
  rect 71x75 smd: 11(-258,-52.25) 11(-145.5,-52.25) 11(-55.5,-52.25) 11(57,-52.25) 11(155,-52.75)
  rect 91x75 smd: 11(258,-52.75)
  silkscreen extent -256,-102 260,53
"PCBComponent_1 - duplicate" [mm]
  rect 4.4x3.3 smd: 1(15.8,-0.7)
  rect 6.2x3.9 smd: 2(6.8,6.45) 3(6.8,-6.45)
  round 2 hole 2 unplated paste+0 mask+0.102: HOLE(3,0)
  body extent 0,-7.73 17.1,7.47, height 11
PDIP300-P8 [mm] "DIP, 8-Leads, Row Spacing 7.62mm, Pitch 2.54mm, Body 9.5x6.6mm"
  rect 1.5x1.5 hole 0.9: 1(-3.81,3.81)
  round 1.5 hole 0.9: 2(-3.81,1.27) 3(-3.81,-1.27) 4(-3.81,-3.81) 5(3.81,-3.81) 6(3.81,-1.27) 7(3.81,1.27) 8(3.81,3.81)
  silkscreen extent -3.93,-4.9 2.65,5.23, body extent -3.55,-4.9 3.55,4.9, height 5.34
SG-3040LC [mm] "Oscillator_CMOS"
  rect 0.8x0.27 smd: 1(-1.2,1.25) 2(-1.2,0.75) 3(-1.2,0.25) 4(-1.2,-0.25) 5(-1.2,-0.75) 6(-1.2,-1.25) 7(1.2,-1.25) 8(1.2,-0.75) 9(1.2,-0.25) 10(1.2,0.25) 11(1.2,0.75) 12(1.2,1.25)
  silkscreen extent -1.32,-1.9 0.05,2.06, body extent -1.2,-1.9 1.2,1.9, height 1.2
"SMA Right Angle Through Hole" [mil] "CONREVSMA002"
  round 90 hole 55: 1(0,0)
  round 90 hole 60: 2(-100,-100) 2(-100,100) 2(100,-100) 2(100,100)
  silkscreen extent -175,-175 175,500
"SMD CAP 0402" [mm] "Chip Capacitor, 2-Leads, Body 1.00x0.50mm, IPC Medium Density"
  rect 0.5x0.5 smd: 0(-0.45,0) 1(0.45,0)
  body extent -0.53,-0.28 0.53,0.28, height 0.5
"SMD Capacitor 0603" [mil]
  rect 30x30 smd: 0(-27.5,0) 1(27.5,0)
  silkscreen extent -50,-23 51,23, body extent -32,-15 32,15, height 19
"SMD RES 0402" [mm]
  rect 0.5x0.5 smd: 0(-0.45,0) 1(0.45,0)
  body extent -0.53,-0.28 0.53,0.28, height 0.5
"SMD Resistor 0603" [mil]
  rect 30x30 smd: 0(-27.5,0) 1(27.5,0)
  silkscreen extent -50,-23 50,23, body extent -32,-15 32,15, height 20
SOIC127P600X175-8N [mm] "SOIC, 8-Leads, Body 4.90x3.90mm, Pitch 1.27mm, IPC Medium Density"
  rect 1.45x0.6 smd: 1(-2.725,1.905) 2(-2.725,0.635) 3(-2.725,-0.635) 4(-2.725,-1.905) 5(2.725,-1.905) 6(2.725,-0.635) 7(2.725,0.635) 8(2.725,1.905)
  silkscreen extent -2.85,-2.5 1.6,2.88, body extent -2,-2.5 2,2.5, height 1.75
SOT23127P600-8N [mm] "MMBT3904TPMSTR-ND"
  rect 0.9x0.8 smd: B(-1,0.95) C(1,0) E(-1,-0.95)
  silkscreen extent -1.12,-1.5 0.7,2.02, body extent -0.7,-1.52 0.7,1.52, height 1.12
SP3010-04UTG [mil] "ESD 4 Channel"
  rect 7.87x26.57 smd: 1(39,17) 2(19,17) 4(-19,17) 5(-39,17) 6(-39,-17) 7(-19,-17) 9(19,-17) 10(39,-17)
  rect 14.96x61 smd: GND(0,0)
  silkscreen extent -56,-43 54,60
TESTPIN [mil]
  round 70 hole 40: 1(0,0)
  silkscreen extent -40,-40 40,40, body extent -40,-40 40,40, height 470
TI-D8_N [mm] "SOIC, 8-Leads, Body 4.9x3.9mm, Pitch 1.27mm, IPC Medium Density"
  oval 2.2x0.6 smd: 1(-2.4,1.905) 2(-2.4,0.635) 3(-2.4,-0.635) 4(-2.4,-1.905) 5(2.4,-1.905) 6(2.4,-0.635) 7(2.4,0.635) 8(2.4,1.905)
  silkscreen extent -2.52,-2.5 0.9,2.88, body extent -2,-2.5 2,2.5, height 1.75
TI-DRC10-2400X1650TP_V [mm] "SON, 10-Leads, Body 3x3mm, Pitch 0.5mm, Thermal Pad 3x1.65mm"
  rect 0.85x0.28 smd: 1(-1.475,1) 2(-1.475,0.5) 3(-1.475,0) 4(-1.475,-0.5) 5(-1.475,-1) 6(1.475,-1) 7(1.475,-0.5) 8(1.475,0) 9(1.475,0.5) 10(1.475,1)
  rect 1.65x2.4 smd: 11(0,0)
  Component Side region: 0.11,1.2 0.11,1.7 0.39,1.7 0.39,1.2
  Component Side region: -0.11,1.2 -0.11,1.7 -0.39,1.7 -0.39,1.2
  Component Side region: 0.11,-1.2 0.11,-1.7 0.39,-1.7 0.39,-1.2
  Component Side region: -0.11,-1.2 -0.11,-1.7 -0.39,-1.7 -0.39,-1.2
  silkscreen extent -2,-1.55 1.55,1.6, body extent -1.5,-1.5 1.5,1.5, height 1
"TSOP-5 _ NCP361SNT1G" [mm] "SOT23, 5-Leads, Body 3.00x2.75mm, Pitch 0.95mm, IPC Medium Density"
  rect 1x0.7 smd: 1(-1.2,0.95) 2(-1.2,0) 3(-1.2,-0.95) 4(1.2,-0.95) 5(1.2,0.95)
  silkscreen extent -1.33,-1.5 0.35,1.97, body extent -0.75,-1.5 0.75,1.5, height 1.1
"WQFN48 for DS90UB914A" [mm] "QFN, 48-Leads, Body 7.00x7.00mm, Pitch 0.50mm, Thermal Pad 5.10x5.10mm, IPC Medium Density"
  rect 0.6x0.25 smd mask+0: 1(-3.4,2.75) 2(-3.4,2.25) 3(-3.4,1.75) 4(-3.4,1.25) 5(-3.4,0.75) 6(-3.4,0.25) 7(-3.4,-0.25) 8(-3.4,-0.75) 9(-3.4,-1.25) 10(-3.4,-1.75) 11(-3.4,-2.25) 12(-3.4,-2.75) 25(3.4,-2.75) 26(3.4,-2.25) 27(3.4,-1.75) 28(3.4,-1.25) 29(3.4,-0.75) 30(3.4,-0.25) 31(3.4,0.25) 32(3.4,0.75) 33(3.4,1.25) 34(3.4,1.75) 35(3.4,2.25) 36(3.4,2.75)
  rect 0.25x0.6 smd mask+0: 13(-2.75,-3.4) 14(-2.25,-3.4) 15(-1.75,-3.4) 16(-1.25,-3.4) 17(-0.75,-3.4) 18(-0.25,-3.4) 19(0.25,-3.4) 20(0.75,-3.4) 21(1.25,-3.4) 22(1.75,-3.4) 23(2.25,-3.4) 24(2.75,-3.4) 37(2.75,3.4) 38(2.25,3.4) 39(1.75,3.4) 40(1.25,3.4) 41(0.75,3.4) 42(0.25,3.4) 43(-0.25,3.4) 44(-0.75,3.4) 45(-1.25,3.4) 46(-1.75,3.4) 47(-2.25,3.4) 48(-2.75,3.4)
  rect 5.1x5.1 smd paste-6: 49(0,0)
  silkscreen extent -4.47,-3.7 3.7,3.7, body extent -3.55,-3.55 3.55,3.55, height 0.8

## Part data
C6 C7 C8 C9 C10 C11 C12 C13 C14 C15 C16 C17 C18 C19 C20 C21 C22 C23 C24 C25 C26 C27 C28 C29 C30 C74 C75 C76 C77: library part Capacitor
C33 C34: "Solid Tantalum Chip Capacitor, Standard T491 Series - Industrial Grade", PackageDocument=Mar-2001, Code_JEITA=3216-18, ComponentLink1Description="Manufacturer Link", ComponentLink1URL=http://www.kemet.com/, ComponentLink2Description=Datasheet, ComponentLink2URL=http://www.kemet.com/kemet/web/homepage/kechome.nsf/vapubfilesname/F3102TA.pdf/$file/F3102TA.pdf, DatasheetDocument=Mar-2001, LatestRevisionDate=19-Mar-2004, LatestRevisionNote="Silkscreen dimensions re-sized.", PackageReference=A, Published=17-Jul-2002, Publisher="Altium Limited"
C35 C36: "Solid Tantalum Chip Capacitor, Standard T495 Series - Low ESR, Surge Robust", PackageDocument=Mar-2001, Code_JEITA=7343-31, ComponentLink1Description="Manufacturer Link", ComponentLink1URL=http://www.kemet.com/, ComponentLink2Description=Datasheet, ComponentLink2URL=http://www.kemet.com/kemet/web/homepage/kechome.nsf/vapubfilesname/F3102TA.pdf/$file/F3102TA.pdf, DatasheetDocument=Mar-2001, LatestRevisionDate=19-Mar-2004, LatestRevisionNote="Silkscreen dimensions re-sized.", PackageReference=D, Published=17-Jul-2002, Publisher="Altium Limited"
J6: library part CMP-2000-05117-1, "Surface Mount Type A HDMI Receptacle without Flange, 19 Positions, 0.5 mm Pitch, -55 to 85 degC, RoHS, Tape and Reel", Color=Black, Contact Rating=0.5A, Insulation Resistance=100MOhms, Manufacturer=FCI, Operating Temperature Range=-55Cto+85C, Voltage Rating=40V, Brand=FCI, Contact Material=CopperAlloy, Contact Plating=Gold, Datasheet URL=https://datasheet.ciiva.com/851/10029449-851120.pdf, Datasheet Version="Rev. S, 06/2012", Factory Pack Quantity=400, Gender=Female, Housing Material=Resin, Manufacturer URL=http://www.fci.com/, Mounting Style=SMD/SMT, Number of Positions=19, Number of Positions / Contacts=19, Orientation=Horizontal, Packaging=Reel, Product Category=HDMI,Displayport&DVIConnectors, Product Type=HDMI, RoHS=Details, Termination Style=SMD
K1 K2 K3: "JMPR2 OPEN BY DEFAULT", Manufacturer="Sullins Connector Solutions", Manufacturer Part Number=PBC36SAAN, Supplier Part Number 1=S1011E-36-ND, Reel=Open, Supplier 1=Digi-Key
R1 R6 R34 R35 R36 R37 R38 R39 R40 R41 R42 R43 R44 R45 R46 R56 R57: library part Resistor
SW4: "Push Button Switch"
TP1 TP2 TP3 TP4: "TESTPIN SINGLE PIN HEADER", Manufacturer 1="Sharon Long Industries", Manufacturer Part Number 1=Cut-it-yourself, Supplier 1 Part number=Cut-It-Yourself, Reel=TH, Supplier 1="Sharon Long Industries"
U5: "1 Mbit, 400kHz, 1.7V, I2C Serial EEPROM, 8-Pin PDIP, Industrial Temperature", Manufacturer=Microchip, Supplier Part Number 1=24AA1025-I/P-ND, Code_JEDEC=MS-001, ComponentLink1Description="Manufacturer URL", ComponentLink1URL=http://www.microchip.com/, ComponentLink2Description=Datasheet, ComponentLink2URL=http://ww1.microchip.com/downloads/en/DeviceDoc/21941F.pdf, ComponentLink3Description="Package Specification", ComponentLink3URL=http://www.microchip.com/stellent/groups/techpub_sg/documents/packagingspec/en012702.pdf, DatasheetVersion="revF, Oct-2008", Mounting Technology="Through Hole", PackageDescription="8-Lead Plastic Dual In-Line (P) - 300 mil Body [PDIP]", PackageReference=PDIP300-P8, PackageVersion="revBB, Aug-2009", PartNumber=24AA1025-I/P, Supplier 1=Digi-Key, Supplier 2=Farnell, Supplier 3=Newark, Supplier 4=Mouser, Supplier Part Number 2=1467720, Supplier Part Number 3=56K7661, Supplier Part Number 4=579-24AA1025-I/P
U6: "Single Output LDO, 1.5 A, Adjustable 0.8 to 3.6 V Output, 0.8 to 5.5 V Input, with Programmable Soft Start, 10-pin SON (DRC), -40 to 125 degC, Green (RoHS & no Sb/Br)", Manufacturer="Texas Instruments", Power Good=TRUE, Rating=Catalog, Supplier Part Number 1=296-21563-2-ND, Accuracy(%)=2, ComponentLink1Description="Manufacturer URL", ComponentLink1URL=http://www.ti.com/, ComponentLink2Description=Datasheet, ComponentLink2URL=http://www.ti.com/general/docs/lit/getliterature.tsp?genericPartNumber=TPS74801&fileType=pdf, ComponentLink3Description="Package Specification", ComponentLink3URL=http://www.ti.com/litv/pdf/mpds117k, ComponentLink4Description="URL Link1", ComponentLink4URL="Samples URL:http://www.ti.com/product/tps74801#samples", DatasheetVersion=SBVS074J, Eco-Plan="Green (RoHS & no Sb/Br)", Iout(Max)(A)=1.5, Iq(Typ)(mA)=1, Mounting Technology="Surface Mount", PackageDescription="10-Pin Plastic Small Outline, Body 3 x 3 mm, Pitch 0.5 mm", PackageReference=DRC10-2400X1650TP, PackageVersion=4204102-3/L, PartNumber=TPS74801DRCR, SubFamily="Single Channel LDO", Supplier 1=Digi-Key, Supplier 2=Digi-Key, Supplier 3=Digi-Key, Supplier 4=Newark, Supplier 5=Mouser, Supplier Part Number 2=296-21563-1-ND, Supplier Part Number 3=296-21563-6-ND, Supplier Part Number 4=30M1868, Supplier Part Number 5=595-TPS74801DRCR, Vdo(Typ)(mV)=60, Vin(Max)(V)=5.5, Vin(Min)(V)=0.8, Vout Adj(Max)(V)=3.6, Vout Adj(Min)(V)=0.8
U7: "Single Output Fast Transient Response LDO, 1 A, Adjustable 1.2 to 5.5 V Output, 2.7 to 10 V Input, with Low IQ, 8-pin SOIC (D), -40 to 125 degC, Green (RoHS & no Sb/Br)", Manufacturer="Texas Instruments", Power Good=TRUE, Supplier Part Number 1=296-2743-5-ND, Accuracy(%)=2, Code_JEDEC=MS-012, ComponentLink1Description="Manufacturer URL", ComponentLink1URL=http://www.ti.com/, ComponentLink2Description=Datasheet, ComponentLink2URL=http://www.ti.com/general/docs/lit/getliterature.tsp?genericPartNumber=TPS76801&fileType=pdf, ComponentLink3Description="Package Specification", ComponentLink3URL=http://www.ti.com/litv/pdf/msoi002j, DatasheetVersion=SLVS211L, Eco-Plan="Green (RoHS & no Sb/Br)", Iout(Max)(A)=1, Iq(Typ)(mA)=0.08, Mounting Technology="Surface Mount", PackageDescription="8-Pin Plastic Small Outline, Body 4.9 x 3.9 mm, Pitch 1.27 mm", PackageReference=D8, PackageVersion=4040047-3/M, PartNumber=TPS76801QD, SubFamily="Single Channel LDO", Supplier 1=Digi-Key, Supplier 2=Farnell, Supplier 3=Mouser, Supplier Part Number 2=8461473, Supplier Part Number 3=595-TPS76801QD, Vdo(Typ)(mV)=230, Vin(Max)(V)=10, Vin(Min)(V)=2.7, Vout Adj(Max)(V)=5.5, Vout Adj(Min)(V)=1.2
U8: "Buck Step Down Regulator with 2.05 to 6 V Input and 1.8 V Output, -40 to 85 degC, 6-Pin SON (DRY), Green (RoHS & no Sb/Br)", Manufacturer="Texas Instruments", Rating=Catalog, Supplier Part Number 1=296-24485-2-ND, Switch Current Limit(Typ)(A)=0.84, ComponentLink1Description=Datasheet, ComponentLink1URL=http://www.ti.com/general/docs/lit/getliterature.tsp?genericPartNumber=TPS62231&fileType=pdf, ComponentLink2Description="Package Specification", ComponentLink2URL=http://www.ti.com/litv/pdf/mpds221e, ComponentLink3Description="URL Link1", ComponentLink3URL="Samples URL:http://www.ti.com/product/tps62231#samples", DatasheetVersion=SLVS941E, Duty Cycle(Max)(%)=100, Eco-Plan="Green (RoHS & no Sb/Br)", Iout(Max)(A)=0.5, Iq(Typ)(mA)=0.022, Mounting Technology="Surface Mount", PackageDescription="6-Pin Plastic Small Outline No-Lead, 1 x 1.45 x 0.6 mm Body, 0.5 mm Pitch", PackageReference=DRY6, PackageVersion="revF, Dec-2011", PartNumber=TPS62231DRYT, Preset Vout(V)=1.8, Regulated Outputs(#)=1, SubFamily="Step-Down Regulator", Supplier 1=Digi-Key, Supplier 2=Digi-Key, Supplier 3=Digi-Key, Supplier 4=Farnell, Supplier 5=Newark, Supplier 6=Mouser, Supplier Part Number 2=296-24485-1-ND, Supplier Part Number 3=296-24485-6-ND, Supplier Part Number 4=1735598, Supplier Part Number 5=07R8108, Supplier Part Number 6=595-TPS62231DRYT, Synchronous Rectification=TRUE, Topology=Buck, Vin(Max)(V)=6, Vin(Min)(V)=2.05, Vout(Max)(V)=1.8, Vout(Min)(V)=1.8
U9: Freq=19.2MHz
u10: Freq=32.768KHz
U13: library part DUAL_LVDS_TX

## Free pads (board coordinates)
  rect 78.74x39.37 smd: 0(1578,2165.35)
  rect 118.11x78.74 smd: 1(1739.32,2165.35)
  round 125 hole 125 unplated: HOLE(1494,1450)

## Via types
v1: diameter 31, hole 14, Component Side to Solder Side, tented both sides, 160 vias
v2: diameter 14, hole 7, Component Side to Solder Side, tented both sides, 109 vias
v3: diameter 14, hole 7, Component Side to Solder Side, 14 vias
v4: diameter 19.68, hole 7.87, Component Side to Solder Side, tented both sides, 13 vias

## Nets (pads, with @x,y where several pads share a name; then routed paths per layer and width w, separated by ;. In a path a pad name is that pad's centre, name@x,y a point inside that pad or via, vN(x,y) a via of type N, cw(c..) or ccw(c..) an arc to the next point about the centre after c; other vN are vias at no path point)
AVDD: C52.1 C53.1 L7.2 U2.A7 | length 1043.6
  Component Side w5: C52.1@2094,537.5 2111.26,554.76 2111.26,660 2131.76,680.5 v2(2131.76,681.77) U2.A7@2147.5,697.52
  Component Side w20: v1(2594,135) L7.2@2649.16,135 2649.16,77.34 C53.1@2656.5,70
  Solder Side w20: v2(2131.76,681.77) 2131.76,597.24 v1(2594,135)
BISTEN: R40.0 SW2.1 U4.6 | length 383.9
  Component Side w8: SW2.1@1881.5,1662.5 1904.16,1639.84 U4.6@2150.14,1639.84
  Component Side w10: R40.0@1819,1582.5 1819,1600 SW2.1@1881.5,1662.5
CLKIN: *1.3 U2.D7 | length 686.5
  Component Side w6: v2@1598.29,824.29 v2(1599,825) ; v2(2099,810) 2103.27,805.73 2121.69,805.73 2135.42,792.01 U2.D7@2147.5,792.01
  Component Side w10: *1.3@1554,824.29 v2@1598.29,824.29
  Solder Side w6: v2(1599,825) 1635.72,825 ccw(c1635.72,893.28) 1684,845 1754.86,915.86 cw(c1789,881.72) 1789,930 1852.79,930 cw(c1852.79,878.79) 1888.99,915.01 1944.79,859.21 ccw(c1957.37,871.8) 1957.37,854 1995.41,854 2025.65,823.76 2075.39,823.76 2089.15,810 v2(2099,810)
CLKIN_32: R59.1 U2.D6 | length 549.9
  Component Side w5: R59.1@1754,627.5 1747.75,633.75 1759,645 v2(1759,685) ; v2(2164.75,776.26) v2@2166.01,775 ; v2@2164.75,777.76 U2.D6@2179,792.01
  Solder Side w5: v2(1759,685) 1759,698.18 cw(c1821.33,698.18) 1821.33,760.51 2148.76,760.51 ; 2149,760.51 ccw(c2149,776.26) v2(2164.75,776.26)
CVDDQ: *1.1 *1.4 C50.1 C51.1 C79.1 C82.1 L8.1 R26.1 R27.1 R28.1 R58.1 U2.B6 u10.1 u10.12 | length 5776.2
  Component Side w5: U2.B6@2179,729.02 2196.02,712 v2@2226,712
  Component Side w10: v1(1424,675) C82.1@1471.5,675 1454,692.5 *1.1@1454,735.71 *1.4@1454,824.29 ; v1(1639,325) 1661.5,325 C79.1@1676.5,340 1654.79,361.71 u10.12@1654.79,502.24
  Component Side w12: R58.1@836.5,475 836.5,402.5 v1(919,320) 1174,320 1359,505 v1(1359,595) ; v1(2344,175) 2344,225 2404,285
  Component Side w20: 2389,510 C50.1@2426.5,510 ; C51.1@2426.5,555 2379,555 v1(2379,550) 2379,315 2474,220 2639,220 2649,210 2649,225 2679,255 2744,255 2902.5,413.5 2997.5,413.5 3079,495 3079,680 2914,845 2859,845 ; R28.1@2776.5,680 2824,680 2859,715 2859,750 2819,790 ; R27.1@2776.5,790 2819,790 ; R26.1@2776.5,900 2824,900 2859,865 2859,845 ; 2819,790 2824,790 2859,825 2859,845
  Solder Side w5: v2@2226,712 2226,693 2369,550 v1(2379,550)
  Solder Side w10: v1(1639,325) 1644,325 1709,260 1774,260 1819,215 1819,97.5
  Solder Side w12: v1(919,320) 919,235 1056.5,97.5 1819,97.5 2264,95 v1(2344,175) ; v1(1359,595) 1359,610 v1(1424,675)
  other v2: 2226,713
DQ0: R29.1 U4.24 | length 185.4
  Component Side w5: R29.1@2364,1322.5 2392.27,1350.77 U4.24@2392.27,1496.14
DQ1: R25.1 U4.23 | length 199.4
  Component Side w5: R25.1@2314,1322.5 2334.5,1343 2337.08,1343 2372.58,1378.5 U4.23@2372.58,1496.14
DQ2: R24.1 U4.22 | length 233.9
  Component Side w5: R24.1@2264,1322.5 2295.5,1354 2332.52,1354 2355,1376.48 2355,1494.04 U4.22@2352.9,1496.14
DQ3: R23.1 U4.21 | length 259
  Component Side w5: R23.1@2214,1322.5 2252.04,1360.54 2252.04,1374.96 2282.08,1405 2337.5,1405 2337.5,1484.96 2333.21,1489.25 U4.21@2333.21,1496.14
DQ4: R22.1 U4.19 | length 227.4
  Component Side w5: R22.1@2164,1322.5 2290.5,1449 2290.5,1467.45 2293.84,1470.8 U4.19@2293.84,1496.14
DQ5: R21.1 U4.18 | length 259.6
  Component Side w5: R21.1@2114,1322.5 2142.5,1351 2176,1351 2274.16,1449.16 U4.18@2274.16,1496.14
DQ6: R20.1 U4.16 | length 283.9
  Component Side w5: R20.1@2064,1322.5 2103.5,1362 2171,1362 2234.79,1425.79 U4.16@2234.79,1496.14
DQ7: R19.1 U4.15 | length 316.4
  Component Side w5: R19.1@2014,1322.5 2064.5,1373 2166,1373 2215.1,1422.1 U4.15@2215.1,1496.14
DQ8: R67.1 U4.14 | length 349.1
  Component Side w5: R67.1@1964,1322.5 2026.03,1384.53 2161.97,1384.53 2195.42,1417.97 U4.14@2195.42,1496.14
DQ9: R62.1 U4.13 | length 381.7
  Component Side w5: R62.1@1914,1322.81 1988.24,1397.06 2158.94,1397.06 2175.73,1413.84 U4.13@2175.73,1496.14
EZ_SSTX_N: C2.1 U2.A6 | length 167.3
  Component Side w11: C2.1@2169,537.5 2177.29,545.79 ccw(c2158.08,565) 2185.25,565 2185.25,681.05 cw(c2200.33,696.13) 2179,696.13 U2.A6@2179,697.52
EZ_SSTX_P: C3.1 U2.A5 | length 169.1
  Component Side w11: U2.A5@2210.5,697.52 2210.5,696.13 cw(c2189.16,696.13) 2204.25,681.05 2204.25,565 ccw(c2222.95,565) 2209.73,551.77 C3.1@2224,537.5
GND: *1.2 C1.0 C4.0 C5.0 C6.1 C7.1 C8.1 C9.1 C10.1 C11.1 C12.1 C13.1 C14.1 C15.1 C16.1 C17.1 C18.1 C19.1 C20.1 C23.1 C24.1 C25.1 C28.1 C29.1 C30.1 C31.1 C32.1 C33.2 C34.2 C35.2 C36.2 C37.0 C38.0 C39.0 C40.0 C41.0 C42.0 C43.0 C44.0 C45.0 C46.0 C47.0 C48.0 C49.0 C50.0 C51.0 C52.0 C53.0 C54.0 C55.0 C56.0 C57.0 C58.0 C59.0 C60.0 C61.0 C62.0 C63.0 C64.0 C65.0 C66.0 C67.- C68.- C69.0 C70.0 C71.- C72.- C73.0 C74.1 C75.1 C76.1 C77.1 C78.0 C79.0 C80.0 C81.0 C82.0 C83.0 C84.0 J1.5 J1.8 J2.2 J3.2 J4.2 J5.2 J6.2 J6.5 J6.8 J6.11 J6.17 J6.20 J6.21 J6.22 J6.23 L2.1 pad.1 R4.0 R5.0 R30.0 R31.0 R32.0 R34.1 R35.1 R44.0 R45.0 R46.0 R54.0 R55.0 R64.0 R65.0 R66.0 SW1.6 SW1.7 SW1.8 SW2.5 SW2.6 SW2.7 SW2.8 SW3.1 SW3.2 SW3.3 SW4.1 TP1.1 U1.GND U2.A1 U2.A8 U2.B7 U2.B8 U2.B9 U2.D8 U2.E2 U2.G1 U2.G11 U2.J8 U2.K3 U2.K4 U2.K9 U2.K10 U2.K11 U2.L1 U2.L2 U2.L3 U2.L6 U2.L10 U2.L11 U3.2 U3.3 U4.43 U4.44 U4.49 U5.4 U5.7 U6.6 U6.11 U7.1 U7.2 U8.4 U9.NC u10.6 U13.4 | length 10484.2
  Component Side w5: v2(1989,870) 2005.02,870 U2.G11@2021.52,886.5 ; v2(1999,1035) U2.L11@2021.52,1012.48 ; v2(2002.5,1000) U2.K11@2021.52,980.98 ; v2@2049.98,1084.02 v2(2052.77,1084.02) 2053.02,1084.02 U2.L10@2053.02,1012.48 U2.K10@2053.02,980.98 ; v2(2070.5,711.5) 2070.5,715 U2.B9@2084.51,729.02 ; U2.K9@2084.51,980.98 v2(2099,995.47) ; v2(2099,776.01) 2100.01,776.01 U2.D8@2116.01,792.01 ; v2(2100.02,965) 2115.54,949.49 U2.J8@2116.01,949.49 ; U2.A8@2116.01,697.52 2120.5,697.52 2134,711.02 U2.B8@2116.01,729.02 ; v2@2134,715 2137.98,715 2147.5,724.53 U2.B7@2147.5,729.02 ; U2.L6@2179,1012.48 2196.43,995.05 v2@2199.5,995.05 ; U2.K4@2241.99,980.98 U2.K3@2273.49,980.98 U2.L3@2273.49,1012.48 U2.L2@2304.98,1012.48 U2.L1@2336.48,1012.48 v2(2319,995) ; U2.E2@2304.98,823.5 v2@2318.49,810 ; v2@2319,870 2319.98,870 U2.G1@2336.48,886.5 ; U2.A1@2336.48,697.52 2354,680 v2(2354,676.02)
  Component Side w8: R34.1@2234,1842.28 2234,1825 2274.16,1784.84 U4.43@2274.16,1763.86 U4.49@2274.16,1639.84 ; U4.44@2254.47,1763.86 2254.47,1659.53 U4.49@2274.16,1639.84 ; v2(2284,1385) 2306.5,1385 C29.1@2314,1377.5 ; v4(2284,1630) U4.49@2274.16,1639.84 ; v2(2714,1825) R35.1@2741.28,1825
  Component Side w10: v3(254,1062) J6.17@310.32,1062.01 ; J6.11@310.21,944 J6.11@310.32,943.9 311.21,943 v3(370,943) ; J6.2@310.32,766.73 310.45,766.87 v3(370.13,766.87) ; J6.5@310.32,825.79 310.53,826 v3(370,826) ; J6.8@310.32,884.84 310.39,884.92 v3(369,884.92) ; U13.4@385.28,1632.5 386.03,1633.25 437.25,1633.25 v3(438,1634) ; C84.0@394,1347.54 C83.0@443,1347.54 443.46,1348 v3(481,1348) ; C82.0@1526.5,675 1554,702.5 *1.2@1554,735.71 ; C79.0@1731.5,340 1753.21,361.71 u10.6@1753.21,407.76 ; v2(2030.5,1452) 2030.5,1431 C7.1@2031.5,1430
  Component Side w12: C73.0@971.81,1135.31 971.81,1155.73 989.47,1173.38 ; SW3.1@1019,75 SW3.2@1069,75 ; U6.11@1019.31,1200.94 U6.6@1057.38,1200.94 ; C31.1@1026.5,990 C32.1@1026.5,945 1054,917.5 U5.7@1054,845 ; v1(1069,165) SW3.2@1069,75 ; SW3.3@1119,75 SW3.2@1069,75 ; v1(1129.31,1185.31) R55.0@1176.81,1185.31 ; v1(1266.5,1617.5) R54.0@1266.5,1660 ; pad.1@1739.32,2165.35 v1(1867.27,2165.35) ; C8.1@1741.5,1925 C9.1@1741.5,1970 C10.1@1741.5,2020 ; v1(1914,1880) 1941.5,1852.5 C19.1@1941.5,1840 C20.1@1941.5,1795 ; C28.1@1939,1667.5 C24.1@1984,1667.5 C23.1@2029,1667.5 2036.5,1660 v2(2059,1660) ; v2(2030.5,1452) 2030.5,1479 C6.1@2031.5,1480 ; J1.8@2232.5,157.75 v2(2232.5,248.5) 2234,250 U1.GND@2234,335 v2(2234,405) ; v2(2381.5,1797.5) C14.1@2381.5,1875 ; C11.1@2446.5,1930 C12.1@2446.5,1975 C13.1@2446.5,2020 2459,2020 2474,2035 2474,2095 v1@2484,2105 ; C54.0@2481.5,630 2481.5,625.5 2492,615 2549,615 2579,585 v1(2599,585) ; C25.1@2571.5,1555 2634,1492.5 v1(2634,1485) ; C17.1@2571.5,1780 C18.1@2571.5,1740 C16.1@2571.5,1695 C30.1@2571.5,1650 2571.5,1645 v1(2614,1645) ; R45.0@2571.5,1825 v1(2614,1825) ; R44.0@2571.5,1930 v1(2614,1930) ; R46.0@2571.5,2065 v1(2614,2065) ; v1(3179,1215) R65.0@3179,1252.5 ; v1(3179,1430) R66.0@3179,1462.5 ; v1(3184,990) R64.0@3184,1037.5 ; v1(3454,765) SW1.6@3549,765 SW1.7@3549,815 SW1.8@3549,865
  Component Side w20: C82.0@1526.5,675 1549,652.5 1551.5,652.5 ; SW2.8@1584,1665 1584,1835 v1(1674,1925) C8.1@1741.5,1925
  Component Side w25: 634,1230 634,1129.88 C33.2@653.88,1110 653.88,1250.12 ; C78.0@836.5,530 864,557.5 v1(864,575) ; v1(974,1545) C72.-@1016,1545 ; C70.0@1001.81,1355.31 1002.31,1355.81 v1(1002.31,1453.31) ; C71.-@1232.31,1350.31 1232.63,1350 v1(1274,1350) ; U3.2@1431.24,205 U3.3@1431.24,242.4 ; C5.0@1431.24,319.74 U3.3@1431.24,242.4 ; C4.0@1489.1,242.4 U3.3@1431.24,242.4 ; v1(1504,70) C34.2@1568.88,70 ; C60.0@1526.5,1045 v1(1574,1045) ; C79.0@1731.5,340 1759,340 ; v1(1824,905) 1829,900 1844,900 1854,890 C46.0@1876.5,890 ; v1(1824,955) 1834,955 1854,935 C58.0@1876.5,935 ; v1(1824,995) 1844,995 1859,980 C43.0@1876.5,980 ; v1(1824,1040) 1861.5,1040 C42.0@1876.5,1025 ; v1(1824,1080) 1866.5,1080 C39.0@1876.5,1070 ; v1(1834,700) C38.0@1871.5,700 ; v1(1834,735) 1861.5,735 C37.0@1876.5,750 ; v1@1834,855 1844,845 C69.0@1876.5,845 C49.0@1876.5,810 ; v1(1854,560) 1854,575 1876.5,597.5 C44.0@1876.5,600 C41.0@1876.5,650 ; v1(2039,435) R4.0@2039,482.5 ; v1(2094,435) C52.0@2094,482.5 ; C59.0@2094,1157.5 v1(2094,1190) ; C40.0@2149,1157.5 v1(2149,1190) ; C45.0@2204,1157.5 v1(2204,1200) ; v1(2454,450) 2481.5,477.5 C51.0@2481.5,560 ; C65.0@2481.5,685 C66.0@2481.5,740 2584,740 v1(2594,750) ; C56.0@2481.5,795 2509,795 2529,775 v1(2554,775) ; C47.0@2481.5,850 2509,850 2519,840 v1(2529,840) ; C62.0@2481.5,910 2509,910 v1(2524,925) ; C61.0@2481.5,965 v1(2524,965) ; C48.0@2481.5,1020 2486.5,1025 v1(2524,1025) ; v1(2486.5,297.5) C80.0@2486.5,340 ; C1.0@2491.5,180 2498.84,172.66 v1(2498.84,140) L2.1@2498.84,90 ; v1(2582.19,445) U9.NC@2620.69,406.5 ; C64.0@2651.5,850 C63.0@2651.5,895 ; v1(2654,795) C64.0@2654,852.5 ; U9.NC@2707.31,343.5 2769,343.5 2769,330 2734,295 v1(2664,295) 2464,295 2449,310 2449,385 2584,520 v1(2686.5,520) 2789,520 2809,500 v1(2809,475) ; C53.0@2711.5,70 2741.5,40 v1(2854,40) ; C81.0@2766.5,475 v1(2809,475) ; v1@2772.5,343.5 2809,380 v1(2809,475) ; R5.0@2776.5,625 2781.5,620 v1(2824,620) ; R32.0@2776.5,735 v1(2824,735) ; R31.0@2776.5,845 2781.5,850 v1(2824,850) ; R30.0@2776.5,955 2781.5,960 v1(2824,960) ; v1(2974,445) C55.0@2974,482.5 ; C57.0@2974,680 v1(2974,720) ; 1759,340 1704,285 1604,285 1564,325 v1(1564,555) 1719.5,710.5 1769.56,710.5 1799,681.06 1799,380 1759,340 ; 1359,685 v1(1429,615) 1514,615 1551.5,652.5 1629,730 1629,850 1589,890 v1(1579,890) 1384,890 v1(1359,865) 1359,685
  other v1: 3109,100 3109,175 2054,215 2024,250 2074,250 3109,250 1429,280 3109,325 2774,340 1799,505 629,625 659,655 604,660 1829,860 619,1240 594,1280 649,1280 844,1755 804,1760 2799,1900 2474,2105 3029,2195
  other v2: 2133,713 2320,809 2322,870 2197,996
  other v4: 979.63,1220.63 1019,1220.63 979.63,1260 1019,1260 2232.82,1578.82 2284,1578.82 2335.18,1578.82 2232.82,1630 2335.18,1630 2232.82,1681.18 2284,1681.18 2335.18,1681.18
IDX0: R41.0 R44.1 U4.35 | length 303.8
  Component Side w8: U4.35@2417.86,1718.58 2429.05,1718.58 2474.5,1764.03 2474.5,1888 R44.1@2516.5,1930 R41.0@2516.5,1975
IDX1: R42.0 R45.1 U4.34 | length 230.8
  Component Side w8: U4.34@2417.86,1698.9 2429.16,1698.9 2493.5,1763.24 2493.5,1763.86 2491.5,1765.86 2491.5,1812.5 2516.5,1837.5 2516.5,1870 R42.0@2509,1862.5
MODE: R43.0 R46.1 U4.37 | length 381.4
  Component Side w8: U4.37@2392.27,1763.86 2392.27,1773.27 2416.5,1797.5 2416.5,1889.14 2427.36,1900 2464,1900 2491.5,1927.5 2491.5,2007.5 2504,2020 R43.0@2516.5,2020 R46.1@2516.5,2065